# EAGLE board SparkFun Qwiic ToF Imager - VL53L5CX-Panel (EAGLE 9.6.2), part 1 of 4
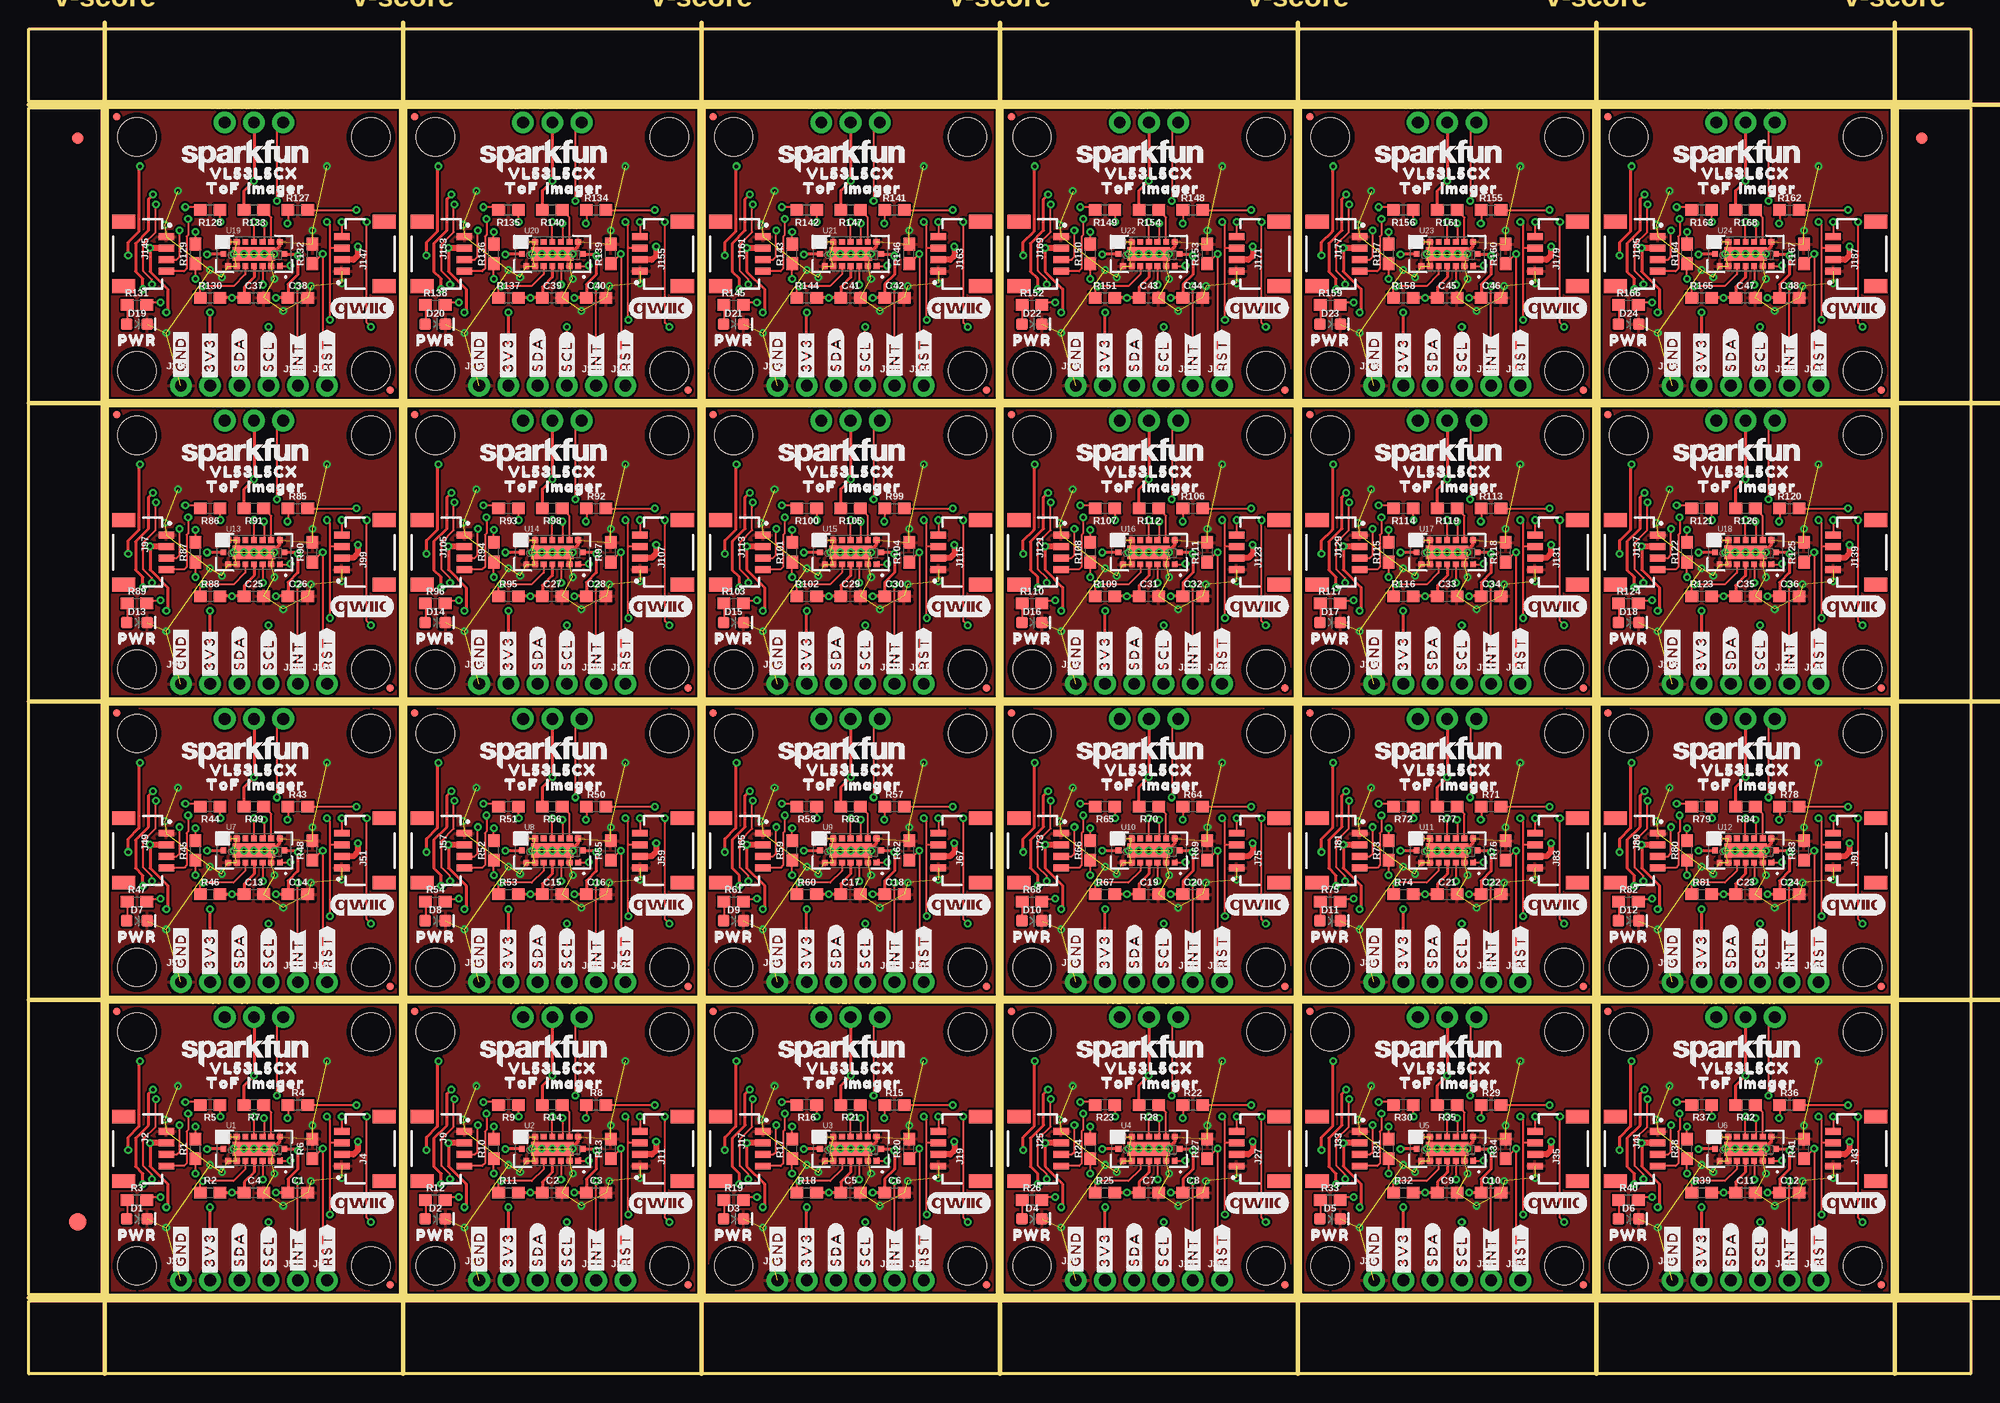
[diagram p0: board, top side]
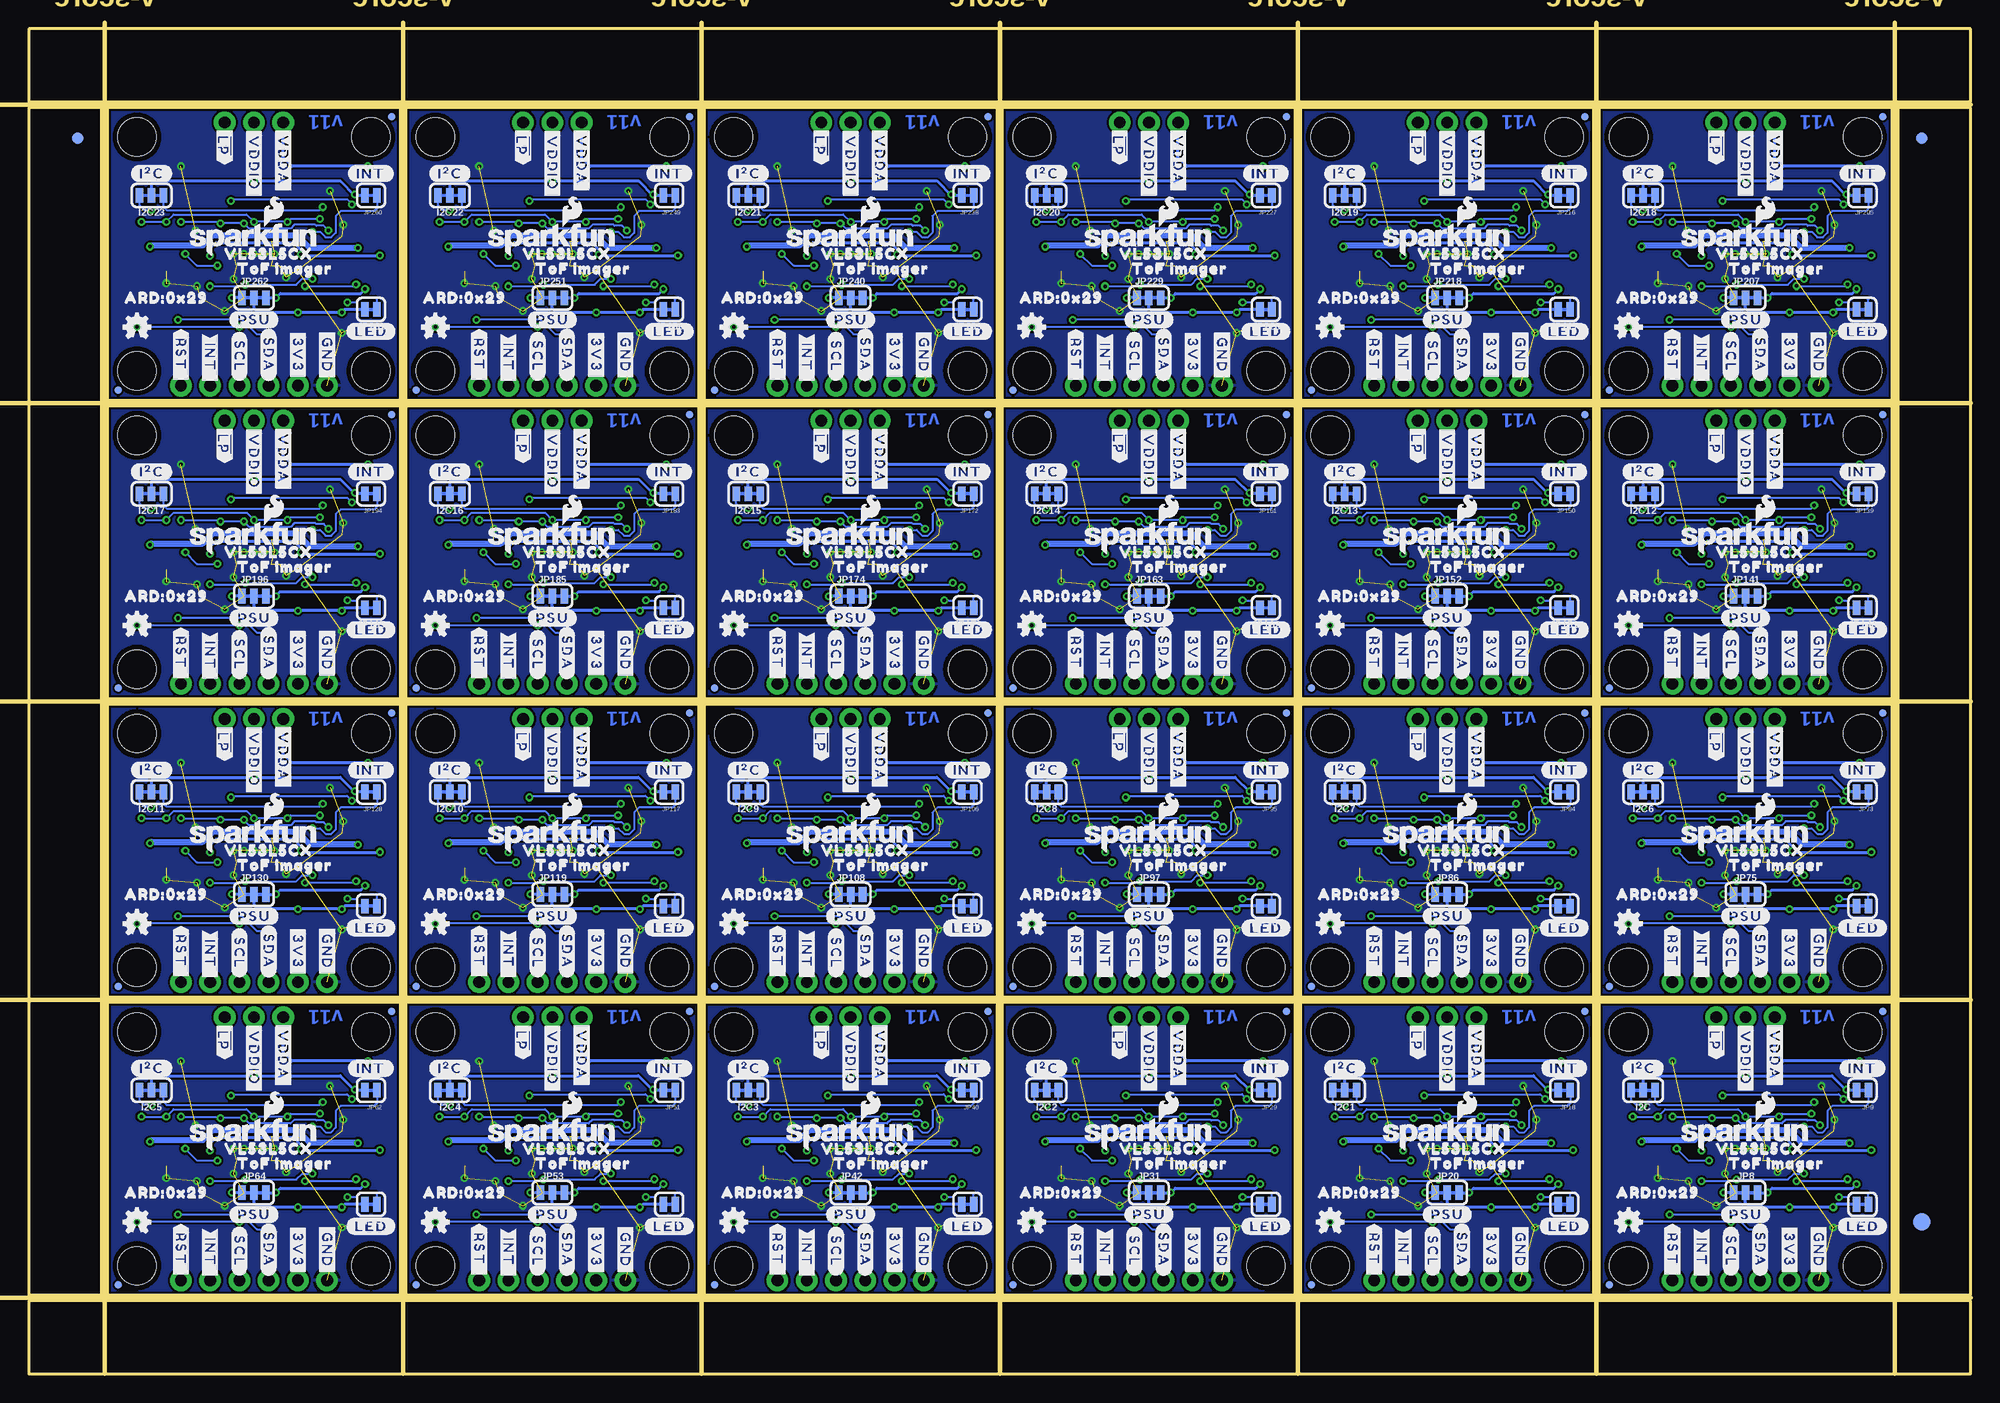
[diagram p1: board, bottom side, seen from below]

Size 168.66 x 116.84 mm. Coordinates in mm from the lower left corner, seen from the top.
Outline: 6.86,6.86 6.86,32.26 32.26,32.26 32.26,6.86 6.86,6.86
Outline: 32.77,6.86 32.77,32.26 58.17,32.26 58.17,6.86 32.77,6.86
Outline: 58.67,6.86 58.67,32.26 84.07,32.26 84.07,6.86 58.67,6.86
Outline: 84.58,6.86 84.58,32.26 109.98,32.26 109.98,6.86 84.58,6.86
Outline: 110.49,6.86 110.49,32.26 135.89,32.26 135.89,6.86 110.49,6.86
Outline: 136.4,6.86 136.4,32.26 161.8,32.26 161.8,6.86 136.4,6.86
Outline: 6.86,32.77 6.86,58.17 32.26,58.17 32.26,32.77 6.86,32.77
Outline: 32.77,32.77 32.77,58.17 58.17,58.17 58.17,32.77 32.77,32.77
Outline: 58.67,32.77 58.67,58.17 84.07,58.17 84.07,32.77 58.67,32.77
Outline: 84.58,32.77 84.58,58.17 109.98,58.17 109.98,32.77 84.58,32.77
Outline: 110.49,32.77 110.49,58.17 135.89,58.17 135.89,32.77 110.49,32.77
Outline: 136.4,32.77 136.4,58.17 161.8,58.17 161.8,32.77 136.4,32.77
Outline: 6.86,58.67 6.86,84.07 32.26,84.07 32.26,58.67 6.86,58.67
Outline: 32.77,58.67 32.77,84.07 58.17,84.07 58.17,58.67 32.77,58.67
Outline: 58.67,58.67 58.67,84.07 84.07,84.07 84.07,58.67 58.67,58.67
Outline: 84.58,58.67 84.58,84.07 109.98,84.07 109.98,58.67 84.58,58.67
Outline: 110.49,58.67 110.49,84.07 135.89,84.07 135.89,58.67 110.49,58.67
Outline: 136.4,58.67 136.4,84.07 161.8,84.07 161.8,58.67 136.4,58.67
Outline: 6.86,84.58 6.86,109.98 32.26,109.98 32.26,84.58 6.86,84.58
Outline: 32.77,84.58 32.77,109.98 58.17,109.98 58.17,84.58 32.77,84.58
Outline: 58.67,84.58 58.67,109.98 84.07,109.98 84.07,84.58 58.67,84.58
Outline: 84.58,84.58 84.58,109.98 109.98,109.98 109.98,84.58 84.58,84.58
Outline: 110.49,84.58 110.49,109.98 135.89,109.98 135.89,84.58 110.49,84.58
Outline: 136.4,84.58 136.4,109.98 161.8,109.98 161.8,84.58 136.4,84.58
Outline: 0,6.35 168.66,6.35 168.66,0 0,0 0,6.35
Outline: 162.31,109.98 168.66,109.98 168.66,6.86 162.31,6.86 162.31,109.98
Outline: 0,116.84 168.66,116.84 168.66,110.49 0,110.49 0,116.84
Outline: 0,109.98 6.35,109.98 6.35,6.86 0,6.86 0,109.98
Copper layers (1*16): Top 0.035mm / dielectric 1.5mm / Bottom 0.035mm
Design rules "SparkFun Qwiic ToF Imager - VL53L5CX": minimum track width 7mil, minimum drill 0.3mm, track to track 7mil, track to pad 7mil, pad to pad 7mil, via to via 7mil, smd to smd 7mil, copper to edge 7mil, drill to drill 7mil, minimum pad ring 7mil, minimum via ring 7mil, stop-mask expansion 3mil, vias tented up to drill 25mil, thermal gap 10mil
Milling: 12 lines

## Footprints (pad centres in the part's own frame; a part is rotated, then mirrored left to right if it is on the bottom)
0603 = smd 1.1 x 1: 1 -0.85,0; 2 0.85,0
LED-0603 = smd 1 x 1: A -0.877,0; C 0.877,0
FIDUCIAL-1X2 = smd 1 x 1: 1 0,0
FIDUCIAL-1.5X3 = smd 1.5 x 1.5: 1 0,0
SMT-JUMPER_3_2-NC_TRACE_SILK = smd 0.66 x 1.27: 1 -1.041,0; 2 0,0; 3 1.041,0
1X01_NO_SILK = drill 1.016 pad 1.88: 1 0,0
JST04_1MM_RA = smd 0.6 x 1.35: 1 -1.5,0; 2 -0.5,0; 3 0.5,0; 4 1.5,0 | smd 1.2 x 2: NC1 2.8,-3.675; NC2 -2.8,-3.675
1X04_NO_SILK = drill 1.016 pad 1.88: 1 0,0; 2 2.54,0; 3 5.08,0; 4 7.62,0
MICRO-FIDUCIAL = smd 0.635 x 0.635: 1 0,0
STAND-OFF = hole 3.302: 0,0
SMT-JUMPER_2_NC_TRACE_SILK = smd 0.66 x 1.27: 1 -0.521,0; 2 0.521,0
VL53L5CX = smd 0.5 x 0.5: A1 2.25,-1.05; A2 1.5,-1.05; A3 0.75,-1.05; A4 0,-1.05; A5 -0.75,-1.05; A6 -1.5,-1.05; A7 -2.25,-1.05; B1 2.65,0; B7 -2.65,0; C1 2.25,1.05; C2 1.5,1.05; C3 0.75,1.05; C4 0,1.05; C5 -0.75,1.05; C6 -1.5,1.05; C7 -2.25,1.05 | smd 3.7 x 1.2: B4 0,0

## Placement (x,y rotation side)
C1  4.7uF  [0603]  23.37,15.75 0 top
C2  0.1uF  [0603]  45.47,15.75 0 top
C3  4.7uF  [0603]  49.28,15.75 0 top
C4  0.1uF  [0603]  19.56,15.75 0 top
C5  0.1uF  [0603]  71.37,15.75 0 top
C6  4.7uF  [0603]  75.18,15.75 0 top
C7  0.1uF  [0603]  97.28,15.75 0 top
C8  4.7uF  [0603]  101.09,15.75 0 top
C9  0.1uF  [0603]  123.19,15.75 0 top
C10  4.7uF  [0603]  127,15.75 0 top
C11  0.1uF  [0603]  149.1,15.75 0 top
C12  4.7uF  [0603]  152.91,15.75 0 top
C13  0.1uF  [0603]  19.56,41.66 0 top
C14  4.7uF  [0603]  23.37,41.66 0 top
C15  0.1uF  [0603]  45.47,41.66 0 top
C16  4.7uF  [0603]  49.28,41.66 0 top
C17  0.1uF  [0603]  71.37,41.66 0 top
C18  4.7uF  [0603]  75.18,41.66 0 top
C19  0.1uF  [0603]  97.28,41.66 0 top
C20  4.7uF  [0603]  101.09,41.66 0 top
C21  0.1uF  [0603]  123.19,41.66 0 top
C22  4.7uF  [0603]  127,41.66 0 top
C23  0.1uF  [0603]  149.1,41.66 0 top
C24  4.7uF  [0603]  152.91,41.66 0 top
C25  0.1uF  [0603]  19.56,67.56 0 top
C26  4.7uF  [0603]  23.37,67.56 0 top
C27  0.1uF  [0603]  45.47,67.56 0 top
C28  4.7uF  [0603]  49.28,67.56 0 top
C29  0.1uF  [0603]  71.37,67.56 0 top
C30  4.7uF  [0603]  75.18,67.56 0 top
C31  0.1uF  [0603]  97.28,67.56 0 top
C32  4.7uF  [0603]  101.09,67.56 0 top
C33  0.1uF  [0603]  123.19,67.56 0 top
C34  4.7uF  [0603]  127,67.56 0 top
C35  0.1uF  [0603]  149.1,67.56 0 top
C36  4.7uF  [0603]  152.91,67.56 0 top
C37  0.1uF  [0603]  19.56,93.47 0 top
C38  4.7uF  [0603]  23.37,93.47 0 top
C39  0.1uF  [0603]  45.47,93.47 0 top
C40  4.7uF  [0603]  49.28,93.47 0 top
C41  0.1uF  [0603]  71.37,93.47 0 top
C42  4.7uF  [0603]  75.18,93.47 0 top
C43  0.1uF  [0603]  97.28,93.47 0 top
C44  4.7uF  [0603]  101.09,93.47 0 top
C45  0.1uF  [0603]  123.19,93.47 0 top
C46  4.7uF  [0603]  127,93.47 0 top
C47  0.1uF  [0603]  149.1,93.47 0 top
C48  4.7uF  [0603]  152.91,93.47 0 top
D1  RED  [LED-0603]  9.4,13.46 0 top
D2  RED  [LED-0603]  35.31,13.46 0 top
D3  RED  [LED-0603]  61.21,13.46 0 top
D4  RED  [LED-0603]  87.12,13.46 0 top
D5  RED  [LED-0603]  113.03,13.46 0 top
D6  RED  [LED-0603]  138.94,13.46 0 top
D7  RED  [LED-0603]  9.4,39.37 0 top
D8  RED  [LED-0603]  35.31,39.37 0 top
D9  RED  [LED-0603]  61.21,39.37 0 top
D10  RED  [LED-0603]  87.12,39.37 0 top
D11  RED  [LED-0603]  113.03,39.37 0 top
D12  RED  [LED-0603]  138.94,39.37 0 top
D13  RED  [LED-0603]  9.4,65.28 0 top
D14  RED  [LED-0603]  35.31,65.28 0 top
D15  RED  [LED-0603]  61.21,65.28 0 top
D16  RED  [LED-0603]  87.12,65.28 0 top
D17  RED  [LED-0603]  113.03,65.28 0 top
D18  RED  [LED-0603]  138.94,65.28 0 top
D19  RED  [LED-0603]  9.4,91.19 0 top
D20  RED  [LED-0603]  35.31,91.19 0 top
D21  RED  [LED-0603]  61.21,91.19 0 top
D22  RED  [LED-0603]  87.12,91.19 0 top
D23  RED  [LED-0603]  113.03,91.19 0 top
D24  RED  [LED-0603]  138.94,91.19 0 top
E$1  [FIDUCIAL-1X2]  4.23,107.31 0 top
E$2  [FIDUCIAL-1X2]  4.23,107.31 0 bottom
E$3  [FIDUCIAL-1X2]  164.42,107.31 0 top
E$4  [FIDUCIAL-1X2]  164.42,107.31 0 bottom
E$5  [FIDUCIAL-1.5X3]  4.23,13.21 0 top
E$6  [FIDUCIAL-1.5X3]  4.23,13.21 0 bottom
I2C  JUMPER-SMT_3_2-NC_TRACE_SILK  [SMT-JUMPER_3_2-NC_TRACE_SILK]  28.45,24.64 180 bottom
I2C1  JUMPER-SMT_3_2-NC_TRACE_SILK  [SMT-JUMPER_3_2-NC_TRACE_SILK]  54.36,24.64 180 bottom
I2C2  JUMPER-SMT_3_2-NC_TRACE_SILK  [SMT-JUMPER_3_2-NC_TRACE_SILK]  80.26,24.64 180 bottom
I2C3  JUMPER-SMT_3_2-NC_TRACE_SILK  [SMT-JUMPER_3_2-NC_TRACE_SILK]  106.17,24.64 180 bottom
I2C4  JUMPER-SMT_3_2-NC_TRACE_SILK  [SMT-JUMPER_3_2-NC_TRACE_SILK]  132.08,24.64 180 bottom
I2C5  JUMPER-SMT_3_2-NC_TRACE_SILK  [SMT-JUMPER_3_2-NC_TRACE_SILK]  157.99,24.64 180 bottom
I2C6  JUMPER-SMT_3_2-NC_TRACE_SILK  [SMT-JUMPER_3_2-NC_TRACE_SILK]  28.45,50.55 180 bottom
I2C7  JUMPER-SMT_3_2-NC_TRACE_SILK  [SMT-JUMPER_3_2-NC_TRACE_SILK]  54.36,50.55 180 bottom
I2C8  JUMPER-SMT_3_2-NC_TRACE_SILK  [SMT-JUMPER_3_2-NC_TRACE_SILK]  80.26,50.55 180 bottom
I2C9  JUMPER-SMT_3_2-NC_TRACE_SILK  [SMT-JUMPER_3_2-NC_TRACE_SILK]  106.17,50.55 180 bottom
I2C10  JUMPER-SMT_3_2-NC_TRACE_SILK  [SMT-JUMPER_3_2-NC_TRACE_SILK]  132.08,50.55 180 bottom
I2C11  JUMPER-SMT_3_2-NC_TRACE_SILK  [SMT-JUMPER_3_2-NC_TRACE_SILK]  157.99,50.55 180 bottom
I2C12  JUMPER-SMT_3_2-NC_TRACE_SILK  [SMT-JUMPER_3_2-NC_TRACE_SILK]  28.45,76.45 180 bottom
I2C13  JUMPER-SMT_3_2-NC_TRACE_SILK  [SMT-JUMPER_3_2-NC_TRACE_SILK]  54.36,76.45 180 bottom
I2C14  JUMPER-SMT_3_2-NC_TRACE_SILK  [SMT-JUMPER_3_2-NC_TRACE_SILK]  80.26,76.45 180 bottom
I2C15  JUMPER-SMT_3_2-NC_TRACE_SILK  [SMT-JUMPER_3_2-NC_TRACE_SILK]  106.17,76.45 180 bottom
I2C16  JUMPER-SMT_3_2-NC_TRACE_SILK  [SMT-JUMPER_3_2-NC_TRACE_SILK]  132.08,76.45 180 bottom
I2C17  JUMPER-SMT_3_2-NC_TRACE_SILK  [SMT-JUMPER_3_2-NC_TRACE_SILK]  157.99,76.45 180 bottom
I2C18  JUMPER-SMT_3_2-NC_TRACE_SILK  [SMT-JUMPER_3_2-NC_TRACE_SILK]  28.45,102.36 180 bottom
I2C19  JUMPER-SMT_3_2-NC_TRACE_SILK  [SMT-JUMPER_3_2-NC_TRACE_SILK]  54.36,102.36 180 bottom
I2C20  JUMPER-SMT_3_2-NC_TRACE_SILK  [SMT-JUMPER_3_2-NC_TRACE_SILK]  80.26,102.36 180 bottom
I2C21  JUMPER-SMT_3_2-NC_TRACE_SILK  [SMT-JUMPER_3_2-NC_TRACE_SILK]  106.17,102.36 180 bottom
I2C22  JUMPER-SMT_3_2-NC_TRACE_SILK  [SMT-JUMPER_3_2-NC_TRACE_SILK]  132.08,102.36 180 bottom
I2C23  JUMPER-SMT_3_2-NC_TRACE_SILK  [SMT-JUMPER_3_2-NC_TRACE_SILK]  157.99,102.36 180 bottom
J1  [1X01_NO_SILK]  22.1,30.99 0 top
J2  [JST04_1MM_RA]  11.94,19.56 270 top
J3  PTH  [1X04_NO_SILK]  13.21,8.13 0 top
J4  [JST04_1MM_RA]  27.18,19.56 90 top
J5  [1X01_NO_SILK]  23.37,8.13 0 top
J6  [1X01_NO_SILK]  25.91,8.13 0 top
J7  [1X01_NO_SILK]  19.56,30.99 0 top
J8  [1X01_NO_SILK]  17.02,30.99 0 top
J9  [JST04_1MM_RA]  37.85,19.56 270 top
J10  PTH  [1X04_NO_SILK]  39.12,8.13 0 top
J11  [JST04_1MM_RA]  53.09,19.56 90 top
J12  [1X01_NO_SILK]  49.28,8.13 0 top
J13  [1X01_NO_SILK]  48.01,30.99 0 top
J14  [1X01_NO_SILK]  51.82,8.13 0 top
J15  [1X01_NO_SILK]  45.47,30.99 0 top
J16  [1X01_NO_SILK]  42.93,30.99 0 top
J17  [JST04_1MM_RA]  63.75,19.56 270 top
J18  PTH  [1X04_NO_SILK]  65.02,8.13 0 top
J19  [JST04_1MM_RA]  78.99,19.56 90 top
J20  [1X01_NO_SILK]  75.18,8.13 0 top
J21  [1X01_NO_SILK]  73.91,30.99 0 top
J22  [1X01_NO_SILK]  77.72,8.13 0 top
J23  [1X01_NO_SILK]  71.37,30.99 0 top
J24  [1X01_NO_SILK]  68.83,30.99 0 top
J25  [JST04_1MM_RA]  89.66,19.56 270 top
J26  PTH  [1X04_NO_SILK]  90.93,8.13 0 top
J27  [JST04_1MM_RA]  104.9,19.56 90 top
J28  [1X01_NO_SILK]  101.09,8.13 0 top
J29  [1X01_NO_SILK]  99.82,30.99 0 top
J30  [1X01_NO_SILK]  103.63,8.13 0 top
J31  [1X01_NO_SILK]  97.28,30.99 0 top
J32  [1X01_NO_SILK]  94.74,30.99 0 top
J33  [JST04_1MM_RA]  115.57,19.56 270 top
J34  PTH  [1X04_NO_SILK]  116.84,8.13 0 top
J35  [JST04_1MM_RA]  130.81,19.56 90 top
J36  [1X01_NO_SILK]  127,8.13 0 top
J37  [1X01_NO_SILK]  125.73,30.99 0 top
J38  [1X01_NO_SILK]  129.54,8.13 0 top
J39  [1X01_NO_SILK]  123.19,30.99 0 top
J40  [1X01_NO_SILK]  120.65,30.99 0 top
J41  [JST04_1MM_RA]  141.48,19.56 270 top
J42  PTH  [1X04_NO_SILK]  142.75,8.13 0 top
J43  [JST04_1MM_RA]  156.72,19.56 90 top
J44  [1X01_NO_SILK]  152.91,8.13 0 top
J45  [1X01_NO_SILK]  151.64,30.99 0 top
J46  [1X01_NO_SILK]  155.45,8.13 0 top
J47  [1X01_NO_SILK]  149.1,30.99 0 top
J48  [1X01_NO_SILK]  146.56,30.99 0 top
J49  [JST04_1MM_RA]  11.94,45.47 270 top
J50  PTH  [1X04_NO_SILK]  13.21,34.04 0 top
J51  [JST04_1MM_RA]  27.18,45.47 90 top
J52  [1X01_NO_SILK]  23.37,34.04 0 top
J53  [1X01_NO_SILK]  22.1,56.9 0 top
J54  [1X01_NO_SILK]  25.91,34.04 0 top
J55  [1X01_NO_SILK]  19.56,56.9 0 top
J56  [1X01_NO_SILK]  17.02,56.9 0 top
J57  [JST04_1MM_RA]  37.85,45.47 270 top
J58  PTH  [1X04_NO_SILK]  39.12,34.04 0 top
J59  [JST04_1MM_RA]  53.09,45.47 90 top
J60  [1X01_NO_SILK]  49.28,34.04 0 top
J61  [1X01_NO_SILK]  48.01,56.9 0 top
J62  [1X01_NO_SILK]  51.82,34.04 0 top
J63  [1X01_NO_SILK]  45.47,56.9 0 top
J64  [1X01_NO_SILK]  42.93,56.9 0 top
J65  [JST04_1MM_RA]  63.75,45.47 270 top
J66  PTH  [1X04_NO_SILK]  65.02,34.04 0 top
J67  [JST04_1MM_RA]  78.99,45.47 90 top
J68  [1X01_NO_SILK]  75.18,34.04 0 top
J69  [1X01_NO_SILK]  73.91,56.9 0 top
J70  [1X01_NO_SILK]  77.72,34.04 0 top
J71  [1X01_NO_SILK]  71.37,56.9 0 top
J72  [1X01_NO_SILK]  68.83,56.9 0 top
J73  [JST04_1MM_RA]  89.66,45.47 270 top
J74  PTH  [1X04_NO_SILK]  90.93,34.04 0 top
J75  [JST04_1MM_RA]  104.9,45.47 90 top
J76  [1X01_NO_SILK]  101.09,34.04 0 top
J77  [1X01_NO_SILK]  99.82,56.9 0 top
J78  [1X01_NO_SILK]  103.63,34.04 0 top
J79  [1X01_NO_SILK]  97.28,56.9 0 top
J80  [1X01_NO_SILK]  94.74,56.9 0 top
J81  [JST04_1MM_RA]  115.57,45.47 270 top
J82  PTH  [1X04_NO_SILK]  116.84,34.04 0 top
J83  [JST04_1MM_RA]  130.81,45.47 90 top
J84  [1X01_NO_SILK]  127,34.04 0 top
J85  [1X01_NO_SILK]  125.73,56.9 0 top
J86  [1X01_NO_SILK]  129.54,34.04 0 top
J87  [1X01_NO_SILK]  123.19,56.9 0 top
J88  [1X01_NO_SILK]  120.65,56.9 0 top
J89  [JST04_1MM_RA]  141.48,45.47 270 top
J90  PTH  [1X04_NO_SILK]  142.75,34.04 0 top
J91  [JST04_1MM_RA]  156.72,45.47 90 top
J92  [1X01_NO_SILK]  152.91,34.04 0 top
J93  [1X01_NO_SILK]  151.64,56.9 0 top
J94  [1X01_NO_SILK]  155.45,34.04 0 top
J95  [1X01_NO_SILK]  149.1,56.9 0 top
J96  [1X01_NO_SILK]  146.56,56.9 0 top
J97  [JST04_1MM_RA]  11.94,71.37 270 top
J98  PTH  [1X04_NO_SILK]  13.21,59.94 0 top
J99  [JST04_1MM_RA]  27.18,71.37 90 top
J100  [1X01_NO_SILK]  23.37,59.94 0 top
J101  [1X01_NO_SILK]  22.1,82.8 0 top
J102  [1X01_NO_SILK]  25.91,59.94 0 top
J103  [1X01_NO_SILK]  19.56,82.8 0 top
J104  [1X01_NO_SILK]  17.02,82.8 0 top
J105  [JST04_1MM_RA]  37.85,71.37 270 top
J106  PTH  [1X04_NO_SILK]  39.12,59.94 0 top
J107  [JST04_1MM_RA]  53.09,71.37 90 top
J108  [1X01_NO_SILK]  49.28,59.94 0 top
J109  [1X01_NO_SILK]  48.01,82.8 0 top
J110  [1X01_NO_SILK]  51.82,59.94 0 top
J111  [1X01_NO_SILK]  45.47,82.8 0 top
J112  [1X01_NO_SILK]  42.93,82.8 0 top
J113  [JST04_1MM_RA]  63.75,71.37 270 top
J114  PTH  [1X04_NO_SILK]  65.02,59.94 0 top
J115  [JST04_1MM_RA]  78.99,71.37 90 top
J116  [1X01_NO_SILK]  75.18,59.94 0 top
J117  [1X01_NO_SILK]  73.91,82.8 0 top
J118  [1X01_NO_SILK]  77.72,59.94 0 top
J119  [1X01_NO_SILK]  71.37,82.8 0 top
J120  [1X01_NO_SILK]  68.83,82.8 0 top
J121  [JST04_1MM_RA]  89.66,71.37 270 top
J122  PTH  [1X04_NO_SILK]  90.93,59.94 0 top
J123  [JST04_1MM_RA]  104.9,71.37 90 top
J124  [1X01_NO_SILK]  101.09,59.94 0 top
J125  [1X01_NO_SILK]  99.82,82.8 0 top
J126  [1X01_NO_SILK]  103.63,59.94 0 top
J127  [1X01_NO_SILK]  97.28,82.8 0 top
J128  [1X01_NO_SILK]  94.74,82.8 0 top
J129  [JST04_1MM_RA]  115.57,71.37 270 top
J130  PTH  [1X04_NO_SILK]  116.84,59.94 0 top
J131  [JST04_1MM_RA]  130.81,71.37 90 top
J132  [1X01_NO_SILK]  127,59.94 0 top
J133  [1X01_NO_SILK]  125.73,82.8 0 top
J134  [1X01_NO_SILK]  129.54,59.94 0 top
J135  [1X01_NO_SILK]  123.19,82.8 0 top
J136  [1X01_NO_SILK]  120.65,82.8 0 top
J137  [JST04_1MM_RA]  141.48,71.37 270 top
J138  PTH  [1X04_NO_SILK]  142.75,59.94 0 top
J139  [JST04_1MM_RA]  156.72,71.37 90 top
J140  [1X01_NO_SILK]  152.91,59.94 0 top
J141  [1X01_NO_SILK]  151.64,82.8 0 top
J142  [1X01_NO_SILK]  155.45,59.94 0 top
J143  [1X01_NO_SILK]  149.1,82.8 0 top
J144  [1X01_NO_SILK]  146.56,82.8 0 top
J145  [JST04_1MM_RA]  11.94,97.28 270 top
J146  PTH  [1X04_NO_SILK]  13.21,85.85 0 top
J147  [JST04_1MM_RA]  27.18,97.28 90 top
J148  [1X01_NO_SILK]  23.37,85.85 0 top
J149  [1X01_NO_SILK]  22.1,108.71 0 top
J150  [1X01_NO_SILK]  25.91,85.85 0 top
J151  [1X01_NO_SILK]  19.56,108.71 0 top
J152  [1X01_NO_SILK]  17.02,108.71 0 top
J153  [JST04_1MM_RA]  37.85,97.28 270 top
J154  PTH  [1X04_NO_SILK]  39.12,85.85 0 top
J155  [JST04_1MM_RA]  53.09,97.28 90 top
J156  [1X01_NO_SILK]  49.28,85.85 0 top
J157  [1X01_NO_SILK]  48.01,108.71 0 top
J158  [1X01_NO_SILK]  51.82,85.85 0 top
J159  [1X01_NO_SILK]  45.47,108.71 0 top
J160  [1X01_NO_SILK]  42.93,108.71 0 top
J161  [JST04_1MM_RA]  63.75,97.28 270 top
J162  PTH  [1X04_NO_SILK]  65.02,85.85 0 top
J163  [JST04_1MM_RA]  78.99,97.28 90 top
J164  [1X01_NO_SILK]  75.18,85.85 0 top
J165  [1X01_NO_SILK]  73.91,108.71 0 top
J166  [1X01_NO_SILK]  77.72,85.85 0 top
J167  [1X01_NO_SILK]  71.37,108.71 0 top
J168  [1X01_NO_SILK]  68.83,108.71 0 top
J169  [JST04_1MM_RA]  89.66,97.28 270 top
J170  PTH  [1X04_NO_SILK]  90.93,85.85 0 top
J171  [JST04_1MM_RA]  104.9,97.28 90 top
J172  [1X01_NO_SILK]  101.09,85.85 0 top
J173  [1X01_NO_SILK]  99.82,108.71 0 top
J174  [1X01_NO_SILK]  103.63,85.85 0 top
J175  [1X01_NO_SILK]  97.28,108.71 0 top
J176  [1X01_NO_SILK]  94.74,108.71 0 top
J177  [JST04_1MM_RA]  115.57,97.28 270 top
J178  PTH  [1X04_NO_SILK]  116.84,85.85 0 top
J179  [JST04_1MM_RA]  130.81,97.28 90 top
J180  [1X01_NO_SILK]  127,85.85 0 top
J181  [1X01_NO_SILK]  125.73,108.71 0 top
J182  [1X01_NO_SILK]  129.54,85.85 0 top
J183  [1X01_NO_SILK]  123.19,108.71 0 top
J184  [1X01_NO_SILK]  120.65,108.71 0 top
J185  [JST04_1MM_RA]  141.48,97.28 270 top
J186  PTH  [1X04_NO_SILK]  142.75,85.85 0 top
J187  [JST04_1MM_RA]  156.72,97.28 90 top
J188  [1X01_NO_SILK]  152.91,85.85 0 top
J189  [1X01_NO_SILK]  151.64,108.71 0 top
J190  [1X01_NO_SILK]  155.45,85.85 0 top
J191  [1X01_NO_SILK]  149.1,108.71 0 top
J192  [1X01_NO_SILK]  146.56,108.71 0 top
JP1  FIDUCIALUFIDUCIAL  [MICRO-FIDUCIAL]  7.62,31.5 0 bottom
JP2  FIDUCIALUFIDUCIAL  [MICRO-FIDUCIAL]  31.37,7.75 0 top
JP3  STAND-OFF  [STAND-OFF]  9.4,29.72 0 top
JP4  STAND-OFF  [STAND-OFF]  29.72,29.72 0 top
JP5  FIDUCIALUFIDUCIAL  [MICRO-FIDUCIAL]  31.37,7.75 0 bottom
JP6  FIDUCIALUFIDUCIAL  [MICRO-FIDUCIAL]  7.62,31.5 0 top
JP7  PWR_LED  [SMT-JUMPER_2_NC_TRACE_SILK]  9.4,14.73 180 bottom
JP8  PSU  [SMT-JUMPER_3_2-NC_TRACE_SILK]  19.56,15.75 0 bottom
JP9  INT  [SMT-JUMPER_2_NC_TRACE_SILK]  9.4,24.64 180 bottom
JP10  STAND-OFF  [STAND-OFF]  9.4,9.4 0 top
JP11  STAND-OFF  [STAND-OFF]  29.72,9.4 0 top
JP12  STAND-OFF  [STAND-OFF]  35.31,29.72 0 top
JP13  STAND-OFF  [STAND-OFF]  55.63,29.72 0 top
JP14  FIDUCIALUFIDUCIAL  [MICRO-FIDUCIAL]  57.28,7.75 0 top
JP15  FIDUCIALUFIDUCIAL  [MICRO-FIDUCIAL]  33.53,31.5 0 top
JP16  FIDUCIALUFIDUCIAL  [MICRO-FIDUCIAL]  33.53,31.5 0 bottom
JP17  FIDUCIALUFIDUCIAL  [MICRO-FIDUCIAL]  57.28,7.75 0 bottom
JP18  INT  [SMT-JUMPER_2_NC_TRACE_SILK]  35.31,24.64 180 bottom
JP19  PWR_LED  [SMT-JUMPER_2_NC_TRACE_SILK]  35.31,14.73 180 bottom
JP20  PSU  [SMT-JUMPER_3_2-NC_TRACE_SILK]  45.47,15.75 0 bottom
JP21  STAND-OFF  [STAND-OFF]  35.31,9.4 0 top
JP22  STAND-OFF  [STAND-OFF]  55.63,9.4 0 top
JP23  STAND-OFF  [STAND-OFF]  61.21,29.72 0 top
JP24  STAND-OFF  [STAND-OFF]  81.53,29.72 0 top
JP25  FIDUCIALUFIDUCIAL  [MICRO-FIDUCIAL]  83.19,7.75 0 top
JP26  FIDUCIALUFIDUCIAL  [MICRO-FIDUCIAL]  59.44,31.5 0 top
JP27  FIDUCIALUFIDUCIAL  [MICRO-FIDUCIAL]  59.44,31.5 0 bottom
JP28  FIDUCIALUFIDUCIAL  [MICRO-FIDUCIAL]  83.19,7.75 0 bottom
JP29  INT  [SMT-JUMPER_2_NC_TRACE_SILK]  61.21,24.64 180 bottom
JP30  PWR_LED  [SMT-JUMPER_2_NC_TRACE_SILK]  61.21,14.73 180 bottom
JP31  PSU  [SMT-JUMPER_3_2-NC_TRACE_SILK]  71.37,15.75 0 bottom
JP32  STAND-OFF  [STAND-OFF]  61.21,9.4 0 top
JP33  STAND-OFF  [STAND-OFF]  81.53,9.4 0 top
JP34  STAND-OFF  [STAND-OFF]  87.12,29.72 0 top
JP35  STAND-OFF  [STAND-OFF]  107.44,29.72 0 top
JP36  FIDUCIALUFIDUCIAL  [MICRO-FIDUCIAL]  109.09,7.75 0 top
JP37  FIDUCIALUFIDUCIAL  [MICRO-FIDUCIAL]  85.34,31.5 0 top
JP38  FIDUCIALUFIDUCIAL  [MICRO-FIDUCIAL]  85.34,31.5 0 bottom
JP39  FIDUCIALUFIDUCIAL  [MICRO-FIDUCIAL]  109.09,7.75 0 bottom
JP40  INT  [SMT-JUMPER_2_NC_TRACE_SILK]  87.12,24.64 180 bottom
JP41  PWR_LED  [SMT-JUMPER_2_NC_TRACE_SILK]  87.12,14.73 180 bottom
JP42  PSU  [SMT-JUMPER_3_2-NC_TRACE_SILK]  97.28,15.75 0 bottom
JP43  STAND-OFF  [STAND-OFF]  87.12,9.4 0 top
JP44  STAND-OFF  [STAND-OFF]  107.44,9.4 0 top
JP45  STAND-OFF  [STAND-OFF]  113.03,29.72 0 top
JP46  STAND-OFF  [STAND-OFF]  133.35,29.72 0 top
JP47  FIDUCIALUFIDUCIAL  [MICRO-FIDUCIAL]  135,7.75 0 top
JP48  FIDUCIALUFIDUCIAL  [MICRO-FIDUCIAL]  111.25,31.5 0 top
JP49  FIDUCIALUFIDUCIAL  [MICRO-FIDUCIAL]  111.25,31.5 0 bottom
JP50  FIDUCIALUFIDUCIAL  [MICRO-FIDUCIAL]  135,7.75 0 bottom
JP51  INT  [SMT-JUMPER_2_NC_TRACE_SILK]  113.03,24.64 180 bottom
JP52  PWR_LED  [SMT-JUMPER_2_NC_TRACE_SILK]  113.03,14.73 180 bottom
JP53  PSU  [SMT-JUMPER_3_2-NC_TRACE_SILK]  123.19,15.75 0 bottom
JP54  STAND-OFF  [STAND-OFF]  113.03,9.4 0 top
JP55  STAND-OFF  [STAND-OFF]  133.35,9.4 0 top
JP56  STAND-OFF  [STAND-OFF]  138.94,29.72 0 top
JP57  STAND-OFF  [STAND-OFF]  159.26,29.72 0 top
JP58  FIDUCIALUFIDUCIAL  [MICRO-FIDUCIAL]  160.91,7.75 0 top
JP59  FIDUCIALUFIDUCIAL  [MICRO-FIDUCIAL]  137.16,31.5 0 top
JP60  FIDUCIALUFIDUCIAL  [MICRO-FIDUCIAL]  137.16,31.5 0 bottom
JP61  FIDUCIALUFIDUCIAL  [MICRO-FIDUCIAL]  160.91,7.75 0 bottom
JP62  INT  [SMT-JUMPER_2_NC_TRACE_SILK]  138.94,24.64 180 bottom
JP63  PWR_LED  [SMT-JUMPER_2_NC_TRACE_SILK]  138.94,14.73 180 bottom
JP64  PSU  [SMT-JUMPER_3_2-NC_TRACE_SILK]  149.1,15.75 0 bottom
JP65  STAND-OFF  [STAND-OFF]  138.94,9.4 0 top
JP66  STAND-OFF  [STAND-OFF]  159.26,9.4 0 top
JP67  STAND-OFF  [STAND-OFF]  9.4,55.63 0 top
JP68  STAND-OFF  [STAND-OFF]  29.72,55.63 0 top
JP69  FIDUCIALUFIDUCIAL  [MICRO-FIDUCIAL]  31.37,33.66 0 top
JP70  FIDUCIALUFIDUCIAL  [MICRO-FIDUCIAL]  7.62,57.4 0 top
JP71  FIDUCIALUFIDUCIAL  [MICRO-FIDUCIAL]  7.62,57.4 0 bottom
JP72  FIDUCIALUFIDUCIAL  [MICRO-FIDUCIAL]  31.37,33.66 0 bottom
JP73  INT  [SMT-JUMPER_2_NC_TRACE_SILK]  9.4,50.55 180 bottom
JP74  PWR_LED  [SMT-JUMPER_2_NC_TRACE_SILK]  9.4,40.64 180 bottom
JP75  PSU  [SMT-JUMPER_3_2-NC_TRACE_SILK]  19.56,41.66 0 bottom
JP76  STAND-OFF  [STAND-OFF]  9.4,35.31 0 top
JP77  STAND-OFF  [STAND-OFF]  29.72,35.31 0 top
JP78  STAND-OFF  [STAND-OFF]  35.31,55.63 0 top
JP79  STAND-OFF  [STAND-OFF]  55.63,55.63 0 top
JP80  FIDUCIALUFIDUCIAL  [MICRO-FIDUCIAL]  57.28,33.66 0 top
JP81  FIDUCIALUFIDUCIAL  [MICRO-FIDUCIAL]  33.53,57.4 0 top
JP82  FIDUCIALUFIDUCIAL  [MICRO-FIDUCIAL]  33.53,57.4 0 bottom
JP83  FIDUCIALUFIDUCIAL  [MICRO-FIDUCIAL]  57.28,33.66 0 bottom
JP84  INT  [SMT-JUMPER_2_NC_TRACE_SILK]  35.31,50.55 180 bottom
JP85  PWR_LED  [SMT-JUMPER_2_NC_TRACE_SILK]  35.31,40.64 180 bottom
JP86  PSU  [SMT-JUMPER_3_2-NC_TRACE_SILK]  45.47,41.66 0 bottom
JP87  STAND-OFF  [STAND-OFF]  35.31,35.31 0 top
JP88  STAND-OFF  [STAND-OFF]  55.63,35.31 0 top
JP89  STAND-OFF  [STAND-OFF]  61.21,55.63 0 top
JP90  STAND-OFF  [STAND-OFF]  81.53,55.63 0 top
JP91  FIDUCIALUFIDUCIAL  [MICRO-FIDUCIAL]  83.19,33.66 0 top
JP92  FIDUCIALUFIDUCIAL  [MICRO-FIDUCIAL]  59.44,57.4 0 top
JP93  FIDUCIALUFIDUCIAL  [MICRO-FIDUCIAL]  59.44,57.4 0 bottom
JP94  FIDUCIALUFIDUCIAL  [MICRO-FIDUCIAL]  83.19,33.66 0 bottom
JP95  INT  [SMT-JUMPER_2_NC_TRACE_SILK]  61.21,50.55 180 bottom
JP96  PWR_LED  [SMT-JUMPER_2_NC_TRACE_SILK]  61.21,40.64 180 bottom
JP97  PSU  [SMT-JUMPER_3_2-NC_TRACE_SILK]  71.37,41.66 0 bottom
JP98  STAND-OFF  [STAND-OFF]  61.21,35.31 0 top
JP99  STAND-OFF  [STAND-OFF]  81.53,35.31 0 top
JP100  STAND-OFF  [STAND-OFF]  87.12,55.63 0 top
JP101  STAND-OFF  [STAND-OFF]  107.44,55.63 0 top
JP102  FIDUCIALUFIDUCIAL  [MICRO-FIDUCIAL]  109.09,33.66 0 top
JP103  FIDUCIALUFIDUCIAL  [MICRO-FIDUCIAL]  85.34,57.4 0 top
JP104  FIDUCIALUFIDUCIAL  [MICRO-FIDUCIAL]  85.34,57.4 0 bottom
JP105  FIDUCIALUFIDUCIAL  [MICRO-FIDUCIAL]  109.09,33.66 0 bottom
JP106  INT  [SMT-JUMPER_2_NC_TRACE_SILK]  87.12,50.55 180 bottom
JP107  PWR_LED  [SMT-JUMPER_2_NC_TRACE_SILK]  87.12,40.64 180 bottom
JP108  PSU  [SMT-JUMPER_3_2-NC_TRACE_SILK]  97.28,41.66 0 bottom
JP109  STAND-OFF  [STAND-OFF]  87.12,35.31 0 top
JP110  STAND-OFF  [STAND-OFF]  107.44,35.31 0 top
JP111  STAND-OFF  [STAND-OFF]  113.03,55.63 0 top
JP112  STAND-OFF  [STAND-OFF]  133.35,55.63 0 top
JP113  FIDUCIALUFIDUCIAL  [MICRO-FIDUCIAL]  135,33.66 0 top
JP114  FIDUCIALUFIDUCIAL  [MICRO-FIDUCIAL]  111.25,57.4 0 top
JP115  FIDUCIALUFIDUCIAL  [MICRO-FIDUCIAL]  111.25,57.4 0 bottom
JP116  FIDUCIALUFIDUCIAL  [MICRO-FIDUCIAL]  135,33.66 0 bottom
JP117  INT  [SMT-JUMPER_2_NC_TRACE_SILK]  113.03,50.55 180 bottom
JP118  PWR_LED  [SMT-JUMPER_2_NC_TRACE_SILK]  113.03,40.64 180 bottom
JP119  PSU  [SMT-JUMPER_3_2-NC_TRACE_SILK]  123.19,41.66 0 bottom
JP120  STAND-OFF  [STAND-OFF]  113.03,35.31 0 top
JP121  STAND-OFF  [STAND-OFF]  133.35,35.31 0 top
JP122  STAND-OFF  [STAND-OFF]  138.94,55.63 0 top
JP123  STAND-OFF  [STAND-OFF]  159.26,55.63 0 top
JP124  FIDUCIALUFIDUCIAL  [MICRO-FIDUCIAL]  160.91,33.66 0 top
JP125  FIDUCIALUFIDUCIAL  [MICRO-FIDUCIAL]  137.16,57.4 0 top
JP126  FIDUCIALUFIDUCIAL  [MICRO-FIDUCIAL]  137.16,57.4 0 bottom
JP127  FIDUCIALUFIDUCIAL  [MICRO-FIDUCIAL]  160.91,33.66 0 bottom
JP128  INT  [SMT-JUMPER_2_NC_TRACE_SILK]  138.94,50.55 180 bottom
JP129  PWR_LED  [SMT-JUMPER_2_NC_TRACE_SILK]  138.94,40.64 180 bottom
JP130  PSU  [SMT-JUMPER_3_2-NC_TRACE_SILK]  149.1,41.66 0 bottom
JP131  STAND-OFF  [STAND-OFF]  138.94,35.31 0 top
JP132  STAND-OFF  [STAND-OFF]  159.26,35.31 0 top
JP133  STAND-OFF  [STAND-OFF]  9.4,81.53 0 top
JP134  STAND-OFF  [STAND-OFF]  29.72,81.53 0 top
JP135  FIDUCIALUFIDUCIAL  [MICRO-FIDUCIAL]  31.37,59.56 0 top
JP136  FIDUCIALUFIDUCIAL  [MICRO-FIDUCIAL]  7.62,83.31 0 top
JP137  FIDUCIALUFIDUCIAL  [MICRO-FIDUCIAL]  7.62,83.31 0 bottom
JP138  FIDUCIALUFIDUCIAL  [MICRO-FIDUCIAL]  31.37,59.56 0 bottom
JP139  INT  [SMT-JUMPER_2_NC_TRACE_SILK]  9.4,76.45 180 bottom
JP140  PWR_LED  [SMT-JUMPER_2_NC_TRACE_SILK]  9.4,66.55 180 bottom
JP141  PSU  [SMT-JUMPER_3_2-NC_TRACE_SILK]  19.56,67.56 0 bottom
JP142  STAND-OFF  [STAND-OFF]  9.4,61.21 0 top
JP143  STAND-OFF  [STAND-OFF]  29.72,61.21 0 top
JP144  STAND-OFF  [STAND-OFF]  35.31,81.53 0 top
JP145  STAND-OFF  [STAND-OFF]  55.63,81.53 0 top
JP146  FIDUCIALUFIDUCIAL  [MICRO-FIDUCIAL]  57.28,59.56 0 top
JP147  FIDUCIALUFIDUCIAL  [MICRO-FIDUCIAL]  33.53,83.31 0 top
JP148  FIDUCIALUFIDUCIAL  [MICRO-FIDUCIAL]  33.53,83.31 0 bottom
JP149  FIDUCIALUFIDUCIAL  [MICRO-FIDUCIAL]  57.28,59.56 0 bottom
JP150  INT  [SMT-JUMPER_2_NC_TRACE_SILK]  35.31,76.45 180 bottom
JP151  PWR_LED  [SMT-JUMPER_2_NC_TRACE_SILK]  35.31,66.55 180 bottom
JP152  PSU  [SMT-JUMPER_3_2-NC_TRACE_SILK]  45.47,67.56 0 bottom
JP153  STAND-OFF  [STAND-OFF]  35.31,61.21 0 top
JP154  STAND-OFF  [STAND-OFF]  55.63,61.21 0 top
JP155  STAND-OFF  [STAND-OFF]  61.21,81.53 0 top
JP156  STAND-OFF  [STAND-OFF]  81.53,81.53 0 top
JP157  FIDUCIALUFIDUCIAL  [MICRO-FIDUCIAL]  83.19,59.56 0 top
JP158  FIDUCIALUFIDUCIAL  [MICRO-FIDUCIAL]  59.44,83.31 0 top
JP159  FIDUCIALUFIDUCIAL  [MICRO-FIDUCIAL]  59.44,83.31 0 bottom
JP160  FIDUCIALUFIDUCIAL  [MICRO-FIDUCIAL]  83.19,59.56 0 bottom
JP161  INT  [SMT-JUMPER_2_NC_TRACE_SILK]  61.21,76.45 180 bottom
JP162  PWR_LED  [SMT-JUMPER_2_NC_TRACE_SILK]  61.21,66.55 180 bottom
JP163  PSU  [SMT-JUMPER_3_2-NC_TRACE_SILK]  71.37,67.56 0 bottom
JP164  STAND-OFF  [STAND-OFF]  61.21,61.21 0 top
JP165  STAND-OFF  [STAND-OFF]  81.53,61.21 0 top
JP166  STAND-OFF  [STAND-OFF]  87.12,81.53 0 top
JP167  STAND-OFF  [STAND-OFF]  107.44,81.53 0 top
JP168  FIDUCIALUFIDUCIAL  [MICRO-FIDUCIAL]  109.09,59.56 0 top
JP169  FIDUCIALUFIDUCIAL  [MICRO-FIDUCIAL]  85.34,83.31 0 top
JP170  FIDUCIALUFIDUCIAL  [MICRO-FIDUCIAL]  85.34,83.31 0 bottom
JP171  FIDUCIALUFIDUCIAL  [MICRO-FIDUCIAL]  109.09,59.56 0 bottom
JP172  INT  [SMT-JUMPER_2_NC_TRACE_SILK]  87.12,76.45 180 bottom
JP173  PWR_LED  [SMT-JUMPER_2_NC_TRACE_SILK]  87.12,66.55 180 bottom
JP174  PSU  [SMT-JUMPER_3_2-NC_TRACE_SILK]  97.28,67.56 0 bottom
JP175  STAND-OFF  [STAND-OFF]  87.12,61.21 0 top
JP176  STAND-OFF  [STAND-OFF]  107.44,61.21 0 top
JP177  STAND-OFF  [STAND-OFF]  113.03,81.53 0 top
JP178  STAND-OFF  [STAND-OFF]  133.35,81.53 0 top
JP179  FIDUCIALUFIDUCIAL  [MICRO-FIDUCIAL]  135,59.56 0 top
JP180  FIDUCIALUFIDUCIAL  [MICRO-FIDUCIAL]  111.25,83.31 0 top
JP181  FIDUCIALUFIDUCIAL  [MICRO-FIDUCIAL]  111.25,83.31 0 bottom
JP182  FIDUCIALUFIDUCIAL  [MICRO-FIDUCIAL]  135,59.56 0 bottom
JP183  INT  [SMT-JUMPER_2_NC_TRACE_SILK]  113.03,76.45 180 bottom
JP184  PWR_LED  [SMT-JUMPER_2_NC_TRACE_SILK]  113.03,66.55 180 bottom
JP185  PSU  [SMT-JUMPER_3_2-NC_TRACE_SILK]  123.19,67.56 0 bottom
JP186  STAND-OFF  [STAND-OFF]  113.03,61.21 0 top
JP187  STAND-OFF  [STAND-OFF]  133.35,61.21 0 top
JP188  STAND-OFF  [STAND-OFF]  138.94,81.53 0 top
JP189  STAND-OFF  [STAND-OFF]  159.26,81.53 0 top
JP190  FIDUCIALUFIDUCIAL  [MICRO-FIDUCIAL]  160.91,59.56 0 top
JP191  FIDUCIALUFIDUCIAL  [MICRO-FIDUCIAL]  137.16,83.31 0 top
JP192  FIDUCIALUFIDUCIAL  [MICRO-FIDUCIAL]  137.16,83.31 0 bottom
JP193  FIDUCIALUFIDUCIAL  [MICRO-FIDUCIAL]  160.91,59.56 0 bottom
JP194  INT  [SMT-JUMPER_2_NC_TRACE_SILK]  138.94,76.45 180 bottom
JP195  PWR_LED  [SMT-JUMPER_2_NC_TRACE_SILK]  138.94,66.55 180 bottom
JP196  PSU  [SMT-JUMPER_3_2-NC_TRACE_SILK]  149.1,67.56 0 bottom
JP197  STAND-OFF  [STAND-OFF]  138.94,61.21 0 top
JP198  STAND-OFF  [STAND-OFF]  159.26,61.21 0 top
JP199  STAND-OFF  [STAND-OFF]  9.4,107.44 0 top
JP200  STAND-OFF  [STAND-OFF]  29.72,107.44 0 top
JP201  FIDUCIALUFIDUCIAL  [MICRO-FIDUCIAL]  31.37,85.47 0 top
JP202  FIDUCIALUFIDUCIAL  [MICRO-FIDUCIAL]  7.62,109.22 0 top
JP203  FIDUCIALUFIDUCIAL  [MICRO-FIDUCIAL]  7.62,109.22 0 bottom
JP204  FIDUCIALUFIDUCIAL  [MICRO-FIDUCIAL]  31.37,85.47 0 bottom
JP205  INT  [SMT-JUMPER_2_NC_TRACE_SILK]  9.4,102.36 180 bottom
JP206  PWR_LED  [SMT-JUMPER_2_NC_TRACE_SILK]  9.4,92.46 180 bottom
JP207  PSU  [SMT-JUMPER_3_2-NC_TRACE_SILK]  19.56,93.47 0 bottom
JP208  STAND-OFF  [STAND-OFF]  9.4,87.12 0 top
JP209  STAND-OFF  [STAND-OFF]  29.72,87.12 0 top
JP210  STAND-OFF  [STAND-OFF]  35.31,107.44 0 top
JP211  STAND-OFF  [STAND-OFF]  55.63,107.44 0 top
JP212  FIDUCIALUFIDUCIAL  [MICRO-FIDUCIAL]  57.28,85.47 0 top
JP213  FIDUCIALUFIDUCIAL  [MICRO-FIDUCIAL]  33.53,109.22 0 top
JP214  FIDUCIALUFIDUCIAL  [MICRO-FIDUCIAL]  33.53,109.22 0 bottom
JP215  FIDUCIALUFIDUCIAL  [MICRO-FIDUCIAL]  57.28,85.47 0 bottom
JP216  INT  [SMT-JUMPER_2_NC_TRACE_SILK]  35.31,102.36 180 bottom
JP217  PWR_LED  [SMT-JUMPER_2_NC_TRACE_SILK]  35.31,92.46 180 bottom
JP218  PSU  [SMT-JUMPER_3_2-NC_TRACE_SILK]  45.47,93.47 0 bottom
JP219  STAND-OFF  [STAND-OFF]  35.31,87.12 0 top
JP220  STAND-OFF  [STAND-OFF]  55.63,87.12 0 top
JP221  STAND-OFF  [STAND-OFF]  61.21,107.44 0 top
JP222  STAND-OFF  [STAND-OFF]  81.53,107.44 0 top
JP223  FIDUCIALUFIDUCIAL  [MICRO-FIDUCIAL]  83.19,85.47 0 top
JP224  FIDUCIALUFIDUCIAL  [MICRO-FIDUCIAL]  59.44,109.22 0 top
JP225  FIDUCIALUFIDUCIAL  [MICRO-FIDUCIAL]  59.44,109.22 0 bottom
JP226  FIDUCIALUFIDUCIAL  [MICRO-FIDUCIAL]  83.19,85.47 0 bottom
JP227  INT  [SMT-JUMPER_2_NC_TRACE_SILK]  61.21,102.36 180 bottom
JP228  PWR_LED  [SMT-JUMPER_2_NC_TRACE_SILK]  61.21,92.46 180 bottom
JP229  PSU  [SMT-JUMPER_3_2-NC_TRACE_SILK]  71.37,93.47 0 bottom
JP230  STAND-OFF  [STAND-OFF]  61.21,87.12 0 top
JP231  STAND-OFF  [STAND-OFF]  81.53,87.12 0 top
JP232  STAND-OFF  [STAND-OFF]  87.12,107.44 0 top
JP233  STAND-OFF  [STAND-OFF]  107.44,107.44 0 top
JP234  FIDUCIALUFIDUCIAL  [MICRO-FIDUCIAL]  109.09,85.47 0 top
JP235  FIDUCIALUFIDUCIAL  [MICRO-FIDUCIAL]  85.34,109.22 0 top
JP236  FIDUCIALUFIDUCIAL  [MICRO-FIDUCIAL]  85.34,109.22 0 bottom
JP237  FIDUCIALUFIDUCIAL  [MICRO-FIDUCIAL]  109.09,85.47 0 bottom
JP238  INT  [SMT-JUMPER_2_NC_TRACE_SILK]  87.12,102.36 180 bottom
JP239  PWR_LED  [SMT-JUMPER_2_NC_TRACE_SILK]  87.12,92.46 180 bottom
JP240  PSU  [SMT-JUMPER_3_2-NC_TRACE_SILK]  97.28,93.47 0 bottom
JP241  STAND-OFF  [STAND-OFF]  87.12,87.12 0 top
JP242  STAND-OFF  [STAND-OFF]  107.44,87.12 0 top
JP243  STAND-OFF  [STAND-OFF]  113.03,107.44 0 top
JP244  STAND-OFF  [STAND-OFF]  133.35,107.44 0 top
JP245  FIDUCIALUFIDUCIAL  [MICRO-FIDUCIAL]  135,85.47 0 top
JP246  FIDUCIALUFIDUCIAL  [MICRO-FIDUCIAL]  111.25,109.22 0 top
JP247  FIDUCIALUFIDUCIAL  [MICRO-FIDUCIAL]  111.25,109.22 0 bottom
JP248  FIDUCIALUFIDUCIAL  [MICRO-FIDUCIAL]  135,85.47 0 bottom
JP249  INT  [SMT-JUMPER_2_NC_TRACE_SILK]  113.03,102.36 180 bottom
JP250  PWR_LED  [SMT-JUMPER_2_NC_TRACE_SILK]  113.03,92.46 180 bottom
JP251  PSU  [SMT-JUMPER_3_2-NC_TRACE_SILK]  123.19,93.47 0 bottom
JP252  STAND-OFF  [STAND-OFF]  113.03,87.12 0 top
JP253  STAND-OFF  [STAND-OFF]  133.35,87.12 0 top
JP254  STAND-OFF  [STAND-OFF]  138.94,107.44 0 top
JP255  STAND-OFF  [STAND-OFF]  159.26,107.44 0 top
JP256  FIDUCIALUFIDUCIAL  [MICRO-FIDUCIAL]  160.91,85.47 0 top
JP257  FIDUCIALUFIDUCIAL  [MICRO-FIDUCIAL]  137.16,109.22 0 top
JP258  FIDUCIALUFIDUCIAL  [MICRO-FIDUCIAL]  137.16,109.22 0 bottom
JP259  FIDUCIALUFIDUCIAL  [MICRO-FIDUCIAL]  160.91,85.47 0 bottom
JP260  INT  [SMT-JUMPER_2_NC_TRACE_SILK]  138.94,102.36 180 bottom
JP261  PWR_LED  [SMT-JUMPER_2_NC_TRACE_SILK]  138.94,92.46 180 bottom
JP262  PSU  [SMT-JUMPER_3_2-NC_TRACE_SILK]  149.1,93.47 0 bottom
JP263  STAND-OFF  [STAND-OFF]  138.94,87.12 0 top
JP264  STAND-OFF  [STAND-OFF]  159.26,87.12 0 top
LOGO1  OSHW-LOGOMINI  [OSHW-LOGO-MINI]  29.72,13.21 0 bottom
LOGO2  OSHW-LOGOMINI  [OSHW-LOGO-MINI]  55.63,13.21 0 bottom
LOGO3  QWIIC_LOGO_CONNECTOR  [QWIIC_5.5MM]  28.96,14.86 0 top
LOGO4  QWIIC_LOGO_CONNECTOR  [QWIIC_5.5MM]  54.86,14.86 0 top
LOGO5  OSHW-LOGOMINI  [OSHW-LOGO-MINI]  81.53,13.21 0 bottom
LOGO6  QWIIC_LOGO_CONNECTOR  [QWIIC_5.5MM]  80.77,14.86 0 top
LOGO7  OSHW-LOGOMINI  [OSHW-LOGO-MINI]  107.44,13.21 0 bottom
LOGO8  QWIIC_LOGO_CONNECTOR  [QWIIC_5.5MM]  106.68,14.86 0 top
LOGO9  OSHW-LOGOMINI  [OSHW-LOGO-MINI]  133.35,13.21 0 bottom
LOGO10  QWIIC_LOGO_CONNECTOR  [QWIIC_5.5MM]  132.59,14.86 0 top
LOGO11  OSHW-LOGOMINI  [OSHW-LOGO-MINI]  159.26,13.21 0 bottom
LOGO12  QWIIC_LOGO_CONNECTOR  [QWIIC_5.5MM]  158.5,14.86 0 top
LOGO13  OSHW-LOGOMINI  [OSHW-LOGO-MINI]  29.72,39.12 0 bottom
LOGO14  QWIIC_LOGO_CONNECTOR  [QWIIC_5.5MM]  28.96,40.77 0 top
LOGO15  OSHW-LOGOMINI  [OSHW-LOGO-MINI]  55.63,39.12 0 bottom
LOGO16  QWIIC_LOGO_CONNECTOR  [QWIIC_5.5MM]  54.86,40.77 0 top
LOGO17  OSHW-LOGOMINI  [OSHW-LOGO-MINI]  81.53,39.12 0 bottom
LOGO18  QWIIC_LOGO_CONNECTOR  [QWIIC_5.5MM]  80.77,40.77 0 top
LOGO19  OSHW-LOGOMINI  [OSHW-LOGO-MINI]  107.44,39.12 0 bottom
LOGO20  QWIIC_LOGO_CONNECTOR  [QWIIC_5.5MM]  106.68,40.77 0 top
LOGO21  OSHW-LOGOMINI  [OSHW-LOGO-MINI]  133.35,39.12 0 bottom
LOGO22  QWIIC_LOGO_CONNECTOR  [QWIIC_5.5MM]  132.59,40.77 0 top
LOGO23  OSHW-LOGOMINI  [OSHW-LOGO-MINI]  159.26,39.12 0 bottom
LOGO24  QWIIC_LOGO_CONNECTOR  [QWIIC_5.5MM]  158.5,40.77 0 top
LOGO25  OSHW-LOGOMINI  [OSHW-LOGO-MINI]  29.72,65.02 0 bottom
LOGO26  QWIIC_LOGO_CONNECTOR  [QWIIC_5.5MM]  28.96,66.67 0 top
LOGO27  OSHW-LOGOMINI  [OSHW-LOGO-MINI]  55.63,65.02 0 bottom
LOGO28  QWIIC_LOGO_CONNECTOR  [QWIIC_5.5MM]  54.86,66.67 0 top
LOGO29  OSHW-LOGOMINI  [OSHW-LOGO-MINI]  81.53,65.02 0 bottom
LOGO30  QWIIC_LOGO_CONNECTOR  [QWIIC_5.5MM]  80.77,66.67 0 top
LOGO31  OSHW-LOGOMINI  [OSHW-LOGO-MINI]  107.44,65.02 0 bottom
LOGO32  QWIIC_LOGO_CONNECTOR  [QWIIC_5.5MM]  106.68,66.67 0 top
LOGO33  OSHW-LOGOMINI  [OSHW-LOGO-MINI]  133.35,65.02 0 bottom
LOGO34  QWIIC_LOGO_CONNECTOR  [QWIIC_5.5MM]  132.59,66.67 0 top
LOGO35  OSHW-LOGOMINI  [OSHW-LOGO-MINI]  159.26,65.02 0 bottom
LOGO36  QWIIC_LOGO_CONNECTOR  [QWIIC_5.5MM]  158.5,66.67 0 top
LOGO37  OSHW-LOGOMINI  [OSHW-LOGO-MINI]  29.72,90.93 0 bottom
LOGO38  QWIIC_LOGO_CONNECTOR  [QWIIC_5.5MM]  28.96,92.58 0 top
LOGO39  OSHW-LOGOMINI  [OSHW-LOGO-MINI]  55.63,90.93 0 bottom
LOGO40  QWIIC_LOGO_CONNECTOR  [QWIIC_5.5MM]  54.86,92.58 0 top
LOGO41  OSHW-LOGOMINI  [OSHW-LOGO-MINI]  81.53,90.93 0 bottom
LOGO42  QWIIC_LOGO_CONNECTOR  [QWIIC_5.5MM]  80.77,92.58 0 top
LOGO43  OSHW-LOGOMINI  [OSHW-LOGO-MINI]  107.44,90.93 0 bottom
LOGO44  QWIIC_LOGO_CONNECTOR  [QWIIC_5.5MM]  106.68,92.58 0 top
LOGO45  OSHW-LOGOMINI  [OSHW-LOGO-MINI]  133.35,90.93 0 bottom
LOGO46  QWIIC_LOGO_CONNECTOR  [QWIIC_5.5MM]  132.59,92.58 0 top
LOGO47  OSHW-LOGOMINI  [OSHW-LOGO-MINI]  159.26,90.93 0 bottom
LOGO48  QWIIC_LOGO_CONNECTOR  [QWIIC_5.5MM]  158.5,92.58 0 top
R1  47k  [0603]  14.48,19.56 90 top
R2  47k  [0603]  15.75,15.75 0 top
R3  1k  [0603]  9.4,15.11 0 top
R4  2.2k  [0603]  23.37,23.37 0 top
R5  2.2k  [0603]  15.75,23.37 180 top
R6  47k  [0603]  24.64,19.56 90 top
R7  47k  [0603]  19.56,23.37 180 top
R8  2.2k  [0603]  49.28,23.37 0 top
R9  2.2k  [0603]  41.66,23.37 180 top
R10  47k  [0603]  40.39,19.56 90 top
R11  47k  [0603]  41.66,15.75 0 top
R12  1k  [0603]  35.31,15.11 0 top
R13  47k  [0603]  50.55,19.56 90 top
R14  47k  [0603]  45.47,23.37 180 top
R15  2.2k  [0603]  75.18,23.37 0 top
R16  2.2k  [0603]  67.56,23.37 180 top
R17  47k  [0603]  66.29,19.56 90 top
R18  47k  [0603]  67.56,15.75 0 top
R19  1k  [0603]  61.21,15.11 0 top
R20  47k  [0603]  76.45,19.56 90 top
R21  47k  [0603]  71.37,23.37 180 top
R22  2.2k  [0603]  101.09,23.37 0 top
R23  2.2k  [0603]  93.47,23.37 180 top
R24  47k  [0603]  92.2,19.56 90 top
R25  47k  [0603]  93.47,15.75 0 top
R26  1k  [0603]  87.12,15.11 0 top
R27  47k  [0603]  102.36,19.56 90 top
R28  47k  [0603]  97.28,23.37 180 top
R29  2.2k  [0603]  127,23.37 0 top
R30  2.2k  [0603]  119.38,23.37 180 top
R31  47k  [0603]  118.11,19.56 90 top
R32  47k  [0603]  119.38,15.75 0 top
R33  1k  [0603]  113.03,15.11 0 top
R34  47k  [0603]  128.27,19.56 90 top
R35  47k  [0603]  123.19,23.37 180 top
R36  2.2k  [0603]  152.91,23.37 0 top
R37  2.2k  [0603]  145.29,23.37 180 top
R38  47k  [0603]  144.02,19.56 90 top
R39  47k  [0603]  145.29,15.75 0 top
R40  1k  [0603]  138.94,15.11 0 top
R41  47k  [0603]  154.18,19.56 90 top
R42  47k  [0603]  149.1,23.37 180 top
R43  2.2k  [0603]  23.37,49.28 0 top
R44  2.2k  [0603]  15.75,49.28 180 top
R45  47k  [0603]  14.48,45.47 90 top
R46  47k  [0603]  15.75,41.66 0 top
R47  1k  [0603]  9.4,41.02 0 top
R48  47k  [0603]  24.64,45.47 90 top
R49  47k  [0603]  19.56,49.28 180 top
R50  2.2k  [0603]  49.28,49.28 0 top
R51  2.2k  [0603]  41.66,49.28 180 top
R52  47k  [0603]  40.39,45.47 90 top
R53  47k  [0603]  41.66,41.66 0 top
R54  1k  [0603]  35.31,41.02 0 top
R55  47k  [0603]  50.55,45.47 90 top
R56  47k  [0603]  45.47,49.28 180 top
R57  2.2k  [0603]  75.18,49.28 0 top
R58  2.2k  [0603]  67.56,49.28 180 top
R59  47k  [0603]  66.29,45.47 90 top
R60  47k  [0603]  67.56,41.66 0 top
R61  1k  [0603]  61.21,41.02 0 top
R62  47k  [0603]  76.45,45.47 90 top
R63  47k  [0603]  71.37,49.28 180 top
R64  2.2k  [0603]  101.09,49.28 0 top
R65  2.2k  [0603]  93.47,49.28 180 top
R66  47k  [0603]  92.2,45.47 90 top
R67  47k  [0603]  93.47,41.66 0 top
R68  1k  [0603]  87.12,41.02 0 top
R69  47k  [0603]  102.36,45.47 90 top
R70  47k  [0603]  97.28,49.28 180 top
R71  2.2k  [0603]  127,49.28 0 top
R72  2.2k  [0603]  119.38,49.28 180 top
R73  47k  [0603]  118.11,45.47 90 top
R74  47k  [0603]  119.38,41.66 0 top
R75  1k  [0603]  113.03,41.02 0 top
R76  47k  [0603]  128.27,45.47 90 top
R77  47k  [0603]  123.19,49.28 180 top
R78  2.2k  [0603]  152.91,49.28 0 top
R79  2.2k  [0603]  145.29,49.28 180 top
R80  47k  [0603]  144.02,45.47 90 top
R81  47k  [0603]  145.29,41.66 0 top
R82  1k  [0603]  138.94,41.02 0 top
R83  47k  [0603]  154.18,45.47 90 top
R84  47k  [0603]  149.1,49.28 180 top
R85  2.2k  [0603]  23.37,75.18 0 top
R86  2.2k  [0603]  15.75,75.18 180 top
R87  47k  [0603]  14.48,71.37 90 top
R88  47k  [0603]  15.75,67.56 0 top
R89  1k  [0603]  9.4,66.93 0 top
R90  47k  [0603]  24.64,71.37 90 top
R91  47k  [0603]  19.56,75.18 180 top
R92  2.2k  [0603]  49.28,75.18 0 top
R93  2.2k  [0603]  41.66,75.18 180 top
R94  47k  [0603]  40.39,71.37 90 top
R95  47k  [0603]  41.66,67.56 0 top
R96  1k  [0603]  35.31,66.93 0 top
R97  47k  [0603]  50.55,71.37 90 top
R98  47k  [0603]  45.47,75.18 180 top
R99  2.2k  [0603]  75.18,75.18 0 top
R100  2.2k  [0603]  67.56,75.18 180 top
R101  47k  [0603]  66.29,71.37 90 top
R102  47k  [0603]  67.56,67.56 0 top
R103  1k  [0603]  61.21,66.93 0 top
R104  47k  [0603]  76.45,71.37 90 top
R105  47k  [0603]  71.37,75.18 180 top
R106  2.2k  [0603]  101.09,75.18 0 top
R107  2.2k  [0603]  93.47,75.18 180 top
R108  47k  [0603]  92.2,71.37 90 top
R109  47k  [0603]  93.47,67.56 0 top
R110  1k  [0603]  87.12,66.93 0 top
R111  47k  [0603]  102.36,71.37 90 top
R112  47k  [0603]  97.28,75.18 180 top
R113  2.2k  [0603]  127,75.18 0 top
R114  2.2k  [0603]  119.38,75.18 180 top
R115  47k  [0603]  118.11,71.37 90 top
R116  47k  [0603]  119.38,67.56 0 top
R117  1k  [0603]  113.03,66.93 0 top
R118  47k  [0603]  128.27,71.37 90 top
R119  47k  [0603]  123.19,75.18 180 top
R120  2.2k  [0603]  152.91,75.18 0 top
R121  2.2k  [0603]  145.29,75.18 180 top
R122  47k  [0603]  144.02,71.37 90 top
R123  47k  [0603]  145.29,67.56 0 top
R124  1k  [0603]  138.94,66.93 0 top
R125  47k  [0603]  154.18,71.37 90 top
R126  47k  [0603]  149.1,75.18 180 top
R127  2.2k  [0603]  23.37,101.09 0 top
R128  2.2k  [0603]  15.75,101.09 180 top
R129  47k  [0603]  14.48,97.28 90 top
R130  47k  [0603]  15.75,93.47 0 top
R131  1k  [0603]  9.4,92.84 0 top
R132  47k  [0603]  24.64,97.28 90 top
R133  47k  [0603]  19.56,101.09 180 top
R134  2.2k  [0603]  49.28,101.09 0 top
R135  2.2k  [0603]  41.66,101.09 180 top
R136  47k  [0603]  40.39,97.28 90 top
R137  47k  [0603]  41.66,93.47 0 top
R138  1k  [0603]  35.31,92.84 0 top
R139  47k  [0603]  50.55,97.28 90 top
R140  47k  [0603]  45.47,101.09 180 top
R141  2.2k  [0603]  75.18,101.09 0 top
R142  2.2k  [0603]  67.56,101.09 180 top
R143  47k  [0603]  66.29,97.28 90 top
R144  47k  [0603]  67.56,93.47 0 top
R145  1k  [0603]  61.21,92.84 0 top
R146  47k  [0603]  76.45,97.28 90 top
R147  47k  [0603]  71.37,101.09 180 top
R148  2.2k  [0603]  101.09,101.09 0 top
R149  2.2k  [0603]  93.47,101.09 180 top
R150  47k  [0603]  92.2,97.28 90 top
R151  47k  [0603]  93.47,93.47 0 top
R152  1k  [0603]  87.12,92.84 0 top
R153  47k  [0603]  102.36,97.28 90 top
R154  47k  [0603]  97.28,101.09 180 top
R155  2.2k  [0603]  127,101.09 0 top
R156  2.2k  [0603]  119.38,101.09 180 top
R157  47k  [0603]  118.11,97.28 90 top
R158  47k  [0603]  119.38,93.47 0 top
R159  1k  [0603]  113.03,92.84 0 top
R160  47k  [0603]  128.27,97.28 90 top
R161  47k  [0603]  123.19,101.09 180 top
R162  2.2k  [0603]  152.91,101.09 0 top
R163  2.2k  [0603]  145.29,101.09 180 top
R164  47k  [0603]  144.02,97.28 90 top
R165  47k  [0603]  145.29,93.47 0 top
R166  1k  [0603]  138.94,92.84 0 top
R167  47k  [0603]  154.18,97.28 90 top
R168  47k  [0603]  149.1,101.09 180 top
U1  VL53L5CX  [VL53L5CX]  19.56,19.56 0 top
U2  VL53L5CX  [VL53L5CX]  45.47,19.56 0 top
U3  VL53L5CX  [VL53L5CX]  71.37,19.56 0 top
U4  VL53L5CX  [VL53L5CX]  97.28,19.56 0 top
U5  VL53L5CX  [VL53L5CX]  123.19,19.56 0 top
U6  VL53L5CX  [VL53L5CX]  149.1,19.56 0 top
U7  VL53L5CX  [VL53L5CX]  19.56,45.47 0 top
U8  VL53L5CX  [VL53L5CX]  45.47,45.47 0 top
U9  VL53L5CX  [VL53L5CX]  71.37,45.47 0 top
U10  VL53L5CX  [VL53L5CX]  97.28,45.47 0 top
U11  VL53L5CX  [VL53L5CX]  123.19,45.47 0 top
U12  VL53L5CX  [VL53L5CX]  149.1,45.47 0 top
U13  VL53L5CX  [VL53L5CX]  19.56,71.37 0 top
U14  VL53L5CX  [VL53L5CX]  45.47,71.37 0 top
U15  VL53L5CX  [VL53L5CX]  71.37,71.37 0 top
U16  VL53L5CX  [VL53L5CX]  97.28,71.37 0 top
U17  VL53L5CX  [VL53L5CX]  123.19,71.37 0 top
U18  VL53L5CX  [VL53L5CX]  149.1,71.37 0 top
U19  VL53L5CX  [VL53L5CX]  19.56,97.28 0 top
U20  VL53L5CX  [VL53L5CX]  45.47,97.28 0 top
U21  VL53L5CX  [VL53L5CX]  71.37,97.28 0 top
U22  VL53L5CX  [VL53L5CX]  97.28,97.28 0 top
U23  VL53L5CX  [VL53L5CX]  123.19,97.28 0 top
U24  VL53L5CX  [VL53L5CX]  149.1,97.28 0 top
U$1  SFE_LOGO_NAME.1_INCH  [SFE_LOGO_NAME_.1]  18.8,28.07 0 top
U$2  SFE_LOGO_NAME_FLAME.1_INCH  [SFE_LOGO_NAME_FLAME_.1]  19.56,20.83 0 bottom
U$3  [#3V3#13]  15.75,10.79 270 bottom
U$4  [PWR12]  9.4,12.06 0 top
U$5  [#LED#10]  9.4,12.83 0 bottom
U$6  [#INT#0]  23.37,10.67 90 top
U$7  [#RST#1]  25.91,10.79 90 top
U$8  [#INT_#0]  23.37,10.41 270 bottom
U$9  [#RST_#1]  25.91,10.67 270 bottom
U$10  [##LP##2]  22.1,28.96 270 bottom
U$11  [#INT#1]  9.4,26.54 0 bottom
U$12  [#VDDA#0]  17.02,27.69 270 bottom
U$13  SFE_LOGO_NAME_FLAME.1_INCH  [SFE_LOGO_NAME_FLAME_.1]  45.47,20.83 0 bottom
U$14  [#VDDIO#1]  19.56,27.43 270 bottom
U$15  [#PSU#0]  19.56,13.84 0 bottom
U$16  [#I�C#0]  28.45,26.54 0 bottom
U$17  [VL53L5CX0]  19.56,26.54 0 top
U$18  [IMAGER2]  21.46,25.27 0 top
U$19  [VL53L5CX0]  18.29,19.56 0 bottom
U$20  [TOF1]  19.56,18.29 0 bottom
U$21  [#3V3#13]  15.72,10.74 90 top
U$22  [IMAGER2]  15.24,18.29 0 bottom
U$23  [TOF1]  16.89,25.27 0 top
U$24  [#SCL#1]  20.83,10.67 270 bottom
U$25  [#SDA#0]  18.29,10.79 270 bottom
U$26  [#GND#62130]  13.21,10.85 90 top
U$27  [ARD#0X290]  27.18,15.75 0 bottom
U$28  [#SDA#62131]  18.29,10.82 90 top
U$29  [#SCL#62132]  20.83,10.67 90 top
U$30  [#GND#62130]  13.21,10.79 270 bottom
U$31  SFE_LOGO_NAME.1_INCH  [SFE_LOGO_NAME_.1]  44.7,28.07 0 top
U$32  [#GND#62130]  39.12,10.85 90 top
U$33  [#SDA#62131]  44.2,10.82 90 top
U$34  [#SCL#62132]  46.74,10.67 90 top
U$35  [#GND#62130]  39.12,10.79 270 bottom
U$36  [#3V3#13]  41.66,10.79 270 bottom
U$37  [#3V3#13]  41.63,10.74 90 top
U$38  [PWR12]  35.31,12.06 0 top
U$39  [#LED#10]  35.31,12.83 0 bottom
U$40  [#INT#0]  49.28,10.67 90 top
U$41  [#RST#1]  51.82,10.79 90 top
U$42  [#INT_#0]  49.28,10.41 270 bottom
U$43  [#RST_#1]  51.82,10.67 270 bottom
U$44  [##LP##2]  48.01,28.96 270 bottom
U$45  [#VDDA#0]  42.93,27.69 270 bottom
U$46  [#VDDIO#1]  45.47,27.43 270 bottom
U$47  [VL53L5CX0]  45.47,26.54 0 top
U$48  [IMAGER2]  47.37,25.27 0 top
U$49  [TOF1]  42.8,25.27 0 top
U$50  [#I�C#0]  54.36,26.54 0 bottom
U$51  [#INT#1]  35.31,26.54 0 bottom
U$52  [#PSU#0]  45.47,13.84 0 bottom
U$53  [VL53L5CX0]  44.2,19.56 0 bottom
U$54  [TOF1]  45.47,18.29 0 bottom
U$55  [IMAGER2]  41.15,18.29 0 bottom
U$56  [#SCL#1]  46.74,10.67 270 bottom
U$57  [#SDA#0]  44.2,10.79 270 bottom
U$58  [ARD#0X290]  53.09,15.75 0 bottom
U$59  SFE_LOGO_NAME_FLAME.1_INCH  [SFE_LOGO_NAME_FLAME_.1]  71.37,20.83 0 bottom
U$60  SFE_LOGO_NAME.1_INCH  [SFE_LOGO_NAME_.1]  70.61,28.07 0 top
U$61  [#GND#62130]  65.02,10.85 90 top
U$62  [#SDA#62131]  70.1,10.82 90 top
U$63  [#SCL#62132]  72.64,10.67 90 top
U$64  [#GND#62130]  65.02,10.79 270 bottom
U$65  [#3V3#13]  67.56,10.79 270 bottom
U$66  [#3V3#13]  67.54,10.74 90 top
U$67  [PWR12]  61.21,12.06 0 top
U$68  [#LED#10]  61.21,12.83 0 bottom
U$69  [#INT#0]  75.18,10.67 90 top
U$70  [#RST#1]  77.72,10.79 90 top
U$71  [#INT_#0]  75.18,10.41 270 bottom
U$72  [#RST_#1]  77.72,10.67 270 bottom
U$73  [##LP##2]  73.91,28.96 270 bottom
U$74  [#VDDA#0]  68.83,27.69 270 bottom
U$75  [#VDDIO#1]  71.37,27.43 270 bottom
U$76  [VL53L5CX0]  71.37,26.54 0 top
U$77  [IMAGER2]  73.28,25.27 0 top
U$78  [TOF1]  68.71,25.27 0 top
U$79  [#I�C#0]  80.26,26.54 0 bottom
U$80  [#INT#1]  61.21,26.54 0 bottom
U$81  [#PSU#0]  71.37,13.84 0 bottom
U$82  [VL53L5CX0]  70.1,19.56 0 bottom
U$83  [TOF1]  71.37,18.29 0 bottom
U$84  [IMAGER2]  67.06,18.29 0 bottom
U$85  [#SCL#1]  72.64,10.67 270 bottom
U$86  [#SDA#0]  70.1,10.79 270 bottom
U$87  [ARD#0X290]  78.99,15.75 0 bottom
U$88  SFE_LOGO_NAME_FLAME.1_INCH  [SFE_LOGO_NAME_FLAME_.1]  97.28,20.83 0 bottom
U$89  SFE_LOGO_NAME.1_INCH  [SFE_LOGO_NAME_.1]  96.52,28.07 0 top
U$90  [#GND#62130]  90.93,10.85 90 top
U$91  [#SDA#62131]  96.01,10.82 90 top
U$92  [#SCL#62132]  98.55,10.67 90 top
U$93  [#GND#62130]  90.93,10.79 270 bottom
U$94  [#3V3#13]  93.47,10.79 270 bottom
U$95  [#3V3#13]  93.45,10.74 90 top
U$96  [PWR12]  87.12,12.06 0 top
U$97  [#LED#10]  87.12,12.83 0 bottom
U$98  [#INT#0]  101.09,10.67 90 top
U$99  [#RST#1]  103.63,10.79 90 top
U$100  [#INT_#0]  101.09,10.41 270 bottom
U$101  [#RST_#1]  103.63,10.67 270 bottom
U$102  [##LP##2]  99.82,28.96 270 bottom
U$103  [#VDDA#0]  94.74,27.69 270 bottom
U$104  [#VDDIO#1]  97.28,27.43 270 bottom
U$105  [VL53L5CX0]  97.28,26.54 0 top
U$106  [IMAGER2]  99.19,25.27 0 top
U$107  [TOF1]  94.62,25.27 0 top
U$108  [#I�C#0]  106.17,26.54 0 bottom
U$109  [#INT#1]  87.12,26.54 0 bottom
U$110  [#PSU#0]  97.28,13.84 0 bottom
U$111  [VL53L5CX0]  96.01,19.56 0 bottom
U$112  [TOF1]  97.28,18.29 0 bottom
U$113  [IMAGER2]  92.96,18.29 0 bottom
U$114  [#SCL#1]  98.55,10.67 270 bottom
U$115  [#SDA#0]  96.01,10.79 270 bottom
U$116  [ARD#0X290]  104.9,15.75 0 bottom
U$117  SFE_LOGO_NAME_FLAME.1_INCH  [SFE_LOGO_NAME_FLAME_.1]  123.19,20.83 0 bottom
U$118  SFE_LOGO_NAME.1_INCH  [SFE_LOGO_NAME_.1]  122.43,28.07 0 top
U$119  [#GND#62130]  116.84,10.85 90 top
U$120  [#SDA#62131]  121.92,10.82 90 top
U$121  [#SCL#62132]  124.46,10.67 90 top
U$122  [#GND#62130]  116.84,10.79 270 bottom
U$123  [#3V3#13]  119.38,10.79 270 bottom
U$124  [#3V3#13]  119.35,10.74 90 top
U$125  [PWR12]  113.03,12.06 0 top
U$126  [#LED#10]  113.03,12.83 0 bottom
U$127  [#INT#0]  127,10.67 90 top
U$128  [#RST#1]  129.54,10.79 90 top
U$129  [#INT_#0]  127,10.41 270 bottom
U$130  [#RST_#1]  129.54,10.67 270 bottom
U$131  [##LP##2]  125.73,28.96 270 bottom
U$132  [#VDDA#0]  120.65,27.69 270 bottom
U$133  [#VDDIO#1]  123.19,27.43 270 bottom
U$134  [VL53L5CX0]  123.19,26.54 0 top
U$135  [IMAGER2]  125.09,25.27 0 top
U$136  [TOF1]  120.52,25.27 0 top
U$137  [#I�C#0]  132.08,26.54 0 bottom
U$138  [#INT#1]  113.03,26.54 0 bottom
U$139  [#PSU#0]  123.19,13.84 0 bottom
U$140  [VL53L5CX0]  121.92,19.56 0 bottom
U$141  [TOF1]  123.19,18.29 0 bottom
U$142  [IMAGER2]  118.87,18.29 0 bottom
U$143  [#SCL#1]  124.46,10.67 270 bottom
U$144  [#SDA#0]  121.92,10.79 270 bottom
U$145  [ARD#0X290]  130.81,15.75 0 bottom
U$146  SFE_LOGO_NAME_FLAME.1_INCH  [SFE_LOGO_NAME_FLAME_.1]  149.1,20.83 0 bottom
U$147  SFE_LOGO_NAME.1_INCH  [SFE_LOGO_NAME_.1]  148.34,28.07 0 top
U$148  [#GND#62130]  142.75,10.85 90 top
U$149  [#SDA#62131]  147.83,10.82 90 top
U$150  [#SCL#62132]  150.37,10.67 90 top
U$151  [#GND#62130]  142.75,10.79 270 bottom
U$152  [#3V3#13]  145.29,10.79 270 bottom
U$153  [#3V3#13]  145.26,10.74 90 top
U$154  [PWR12]  138.94,12.06 0 top
U$155  [#LED#10]  138.94,12.83 0 bottom
U$156  [#INT#0]  152.91,10.67 90 top
U$157  [#RST#1]  155.45,10.79 90 top
U$158  [#INT_#0]  152.91,10.41 270 bottom
U$159  [#RST_#1]  155.45,10.67 270 bottom
U$160  [##LP##2]  151.64,28.96 270 bottom
U$161  [#VDDA#0]  146.56,27.69 270 bottom
U$162  [#VDDIO#1]  149.1,27.43 270 bottom
U$163  [VL53L5CX0]  149.1,26.54 0 top
U$164  [IMAGER2]  151,25.27 0 top
U$165  [TOF1]  146.43,25.27 0 top
U$166  [#I�C#0]  157.99,26.54 0 bottom
U$167  [#INT#1]  138.94,26.54 0 bottom
U$168  [#PSU#0]  149.1,13.84 0 bottom
U$169  [VL53L5CX0]  147.83,19.56 0 bottom
U$170  [TOF1]  149.1,18.29 0 bottom
U$171  [IMAGER2]  144.78,18.29 0 bottom
U$172  [#SCL#1]  150.37,10.67 270 bottom
U$173  [#SDA#0]  147.83,10.79 270 bottom
U$174  [ARD#0X290]  156.72,15.75 0 bottom
U$175  SFE_LOGO_NAME_FLAME.1_INCH  [SFE_LOGO_NAME_FLAME_.1]  19.56,46.74 0 bottom
U$176  SFE_LOGO_NAME.1_INCH  [SFE_LOGO_NAME_.1]  18.8,53.97 0 top
U$177  [#GND#62130]  13.21,36.75 90 top
U$178  [#SDA#62131]  18.29,36.73 90 top
U$179  [#SCL#62132]  20.83,36.58 90 top
U$180  [#GND#62130]  13.21,36.7 270 bottom
U$181  [#3V3#13]  15.75,36.7 270 bottom
U$182  [#3V3#13]  15.72,36.65 90 top
U$183  [PWR12]  9.4,37.97 0 top
U$184  [#LED#10]  9.4,38.73 0 bottom
U$185  [#INT#0]  23.37,36.58 90 top
U$186  [#RST#1]  25.91,36.7 90 top
U$187  [#INT_#0]  23.37,36.32 270 bottom
U$188  [#RST_#1]  25.91,36.58 270 bottom
U$189  [##LP##2]  22.1,54.86 270 bottom
U$190  [#VDDA#0]  17.02,53.59 270 bottom
U$191  [#VDDIO#1]  19.56,53.34 270 bottom
U$192  [VL53L5CX0]  19.56,52.45 0 top
U$193  [IMAGER2]  21.46,51.18 0 top
U$194  [TOF1]  16.89,51.18 0 top
U$195  [#I�C#0]  28.45,52.45 0 bottom
U$196  [#INT#1]  9.4,52.45 0 bottom
U$197  [#PSU#0]  19.56,39.75 0 bottom
U$198  [VL53L5CX0]  18.29,45.47 0 bottom
U$199  [TOF1]  19.56,44.2 0 bottom
U$200  [IMAGER2]  15.24,44.2 0 bottom
U$201  [#SCL#1]  20.83,36.58 270 bottom
U$202  [#SDA#0]  18.29,36.7 270 bottom
U$203  [ARD#0X290]  27.18,41.66 0 bottom
U$204  SFE_LOGO_NAME_FLAME.1_INCH  [SFE_LOGO_NAME_FLAME_.1]  45.47,46.74 0 bottom
U$205  SFE_LOGO_NAME.1_INCH  [SFE_LOGO_NAME_.1]  44.7,53.97 0 top
U$206  [#GND#62130]  39.12,36.75 90 top
U$207  [#SDA#62131]  44.2,36.73 90 top
U$208  [#SCL#62132]  46.74,36.58 90 top
U$209  [#GND#62130]  39.12,36.7 270 bottom
U$210  [#3V3#13]  41.66,36.7 270 bottom
U$211  [#3V3#13]  41.63,36.65 90 top
U$212  [PWR12]  35.31,37.97 0 top
U$213  [#LED#10]  35.31,38.73 0 bottom
U$214  [#INT#0]  49.28,36.58 90 top
U$215  [#RST#1]  51.82,36.7 90 top
U$216  [#INT_#0]  49.28,36.32 270 bottom
U$217  [#RST_#1]  51.82,36.58 270 bottom
U$218  [##LP##2]  48.01,54.86 270 bottom
U$219  [#VDDA#0]  42.93,53.59 270 bottom
U$220  [#VDDIO#1]  45.47,53.34 270 bottom
U$221  [VL53L5CX0]  45.47,52.45 0 top
U$222  [IMAGER2]  47.37,51.18 0 top